# Altium PCB USB_Sniffer.PcbDoc (part 1 of 2)
Units mm, origin at the board's own origin, x right, y up, seen from the top; angles counter-clockwise.
Board outline 50 x 42 mm, 4 copper layers (Top Layer, Int1 (GND), Int2 (GND), Bottom Layer), stack 1.564 mm thick; 83 components, 92 nets, 421 pads, 171 vias.
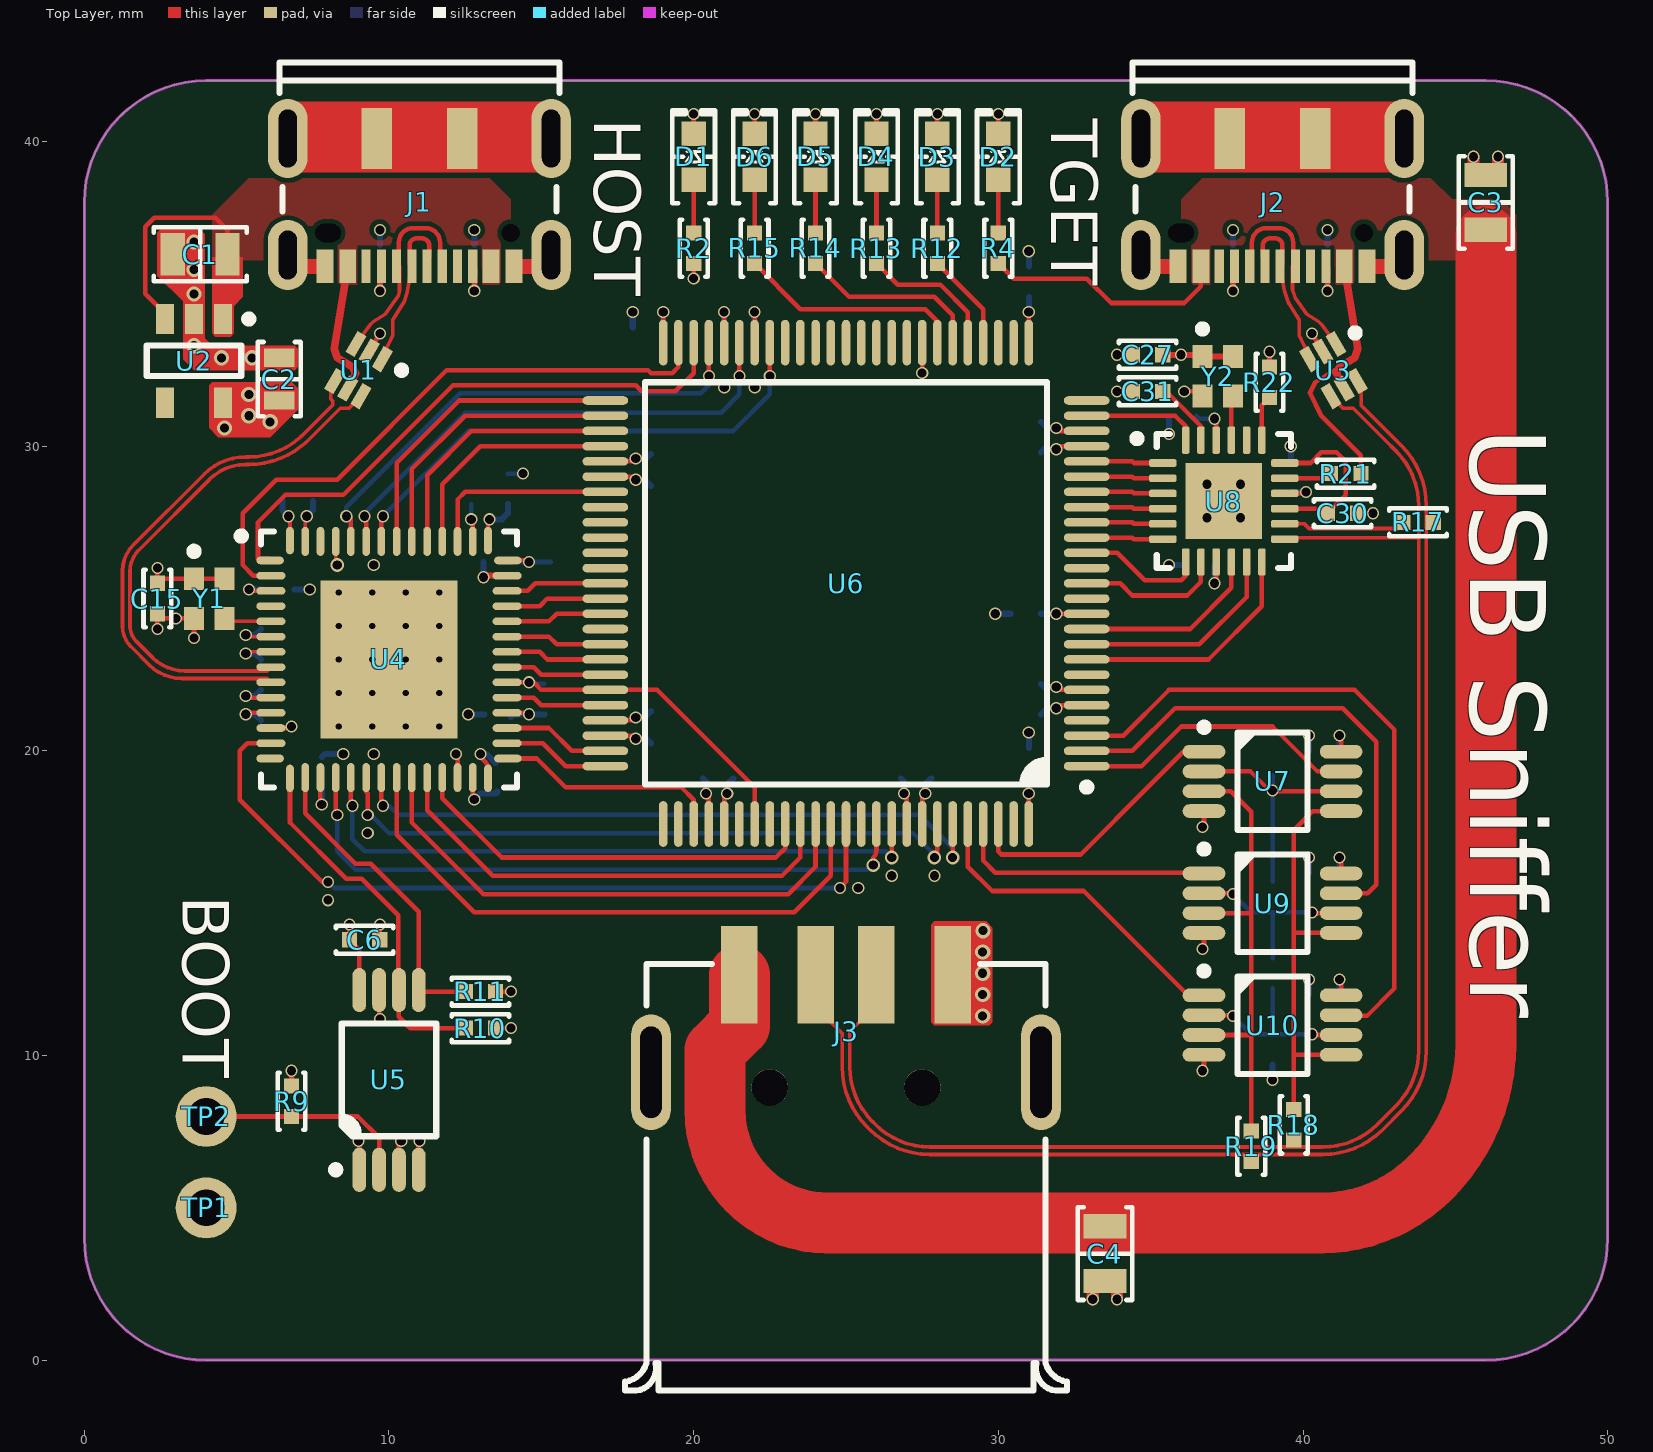
[diagram p0: Top Layer view]
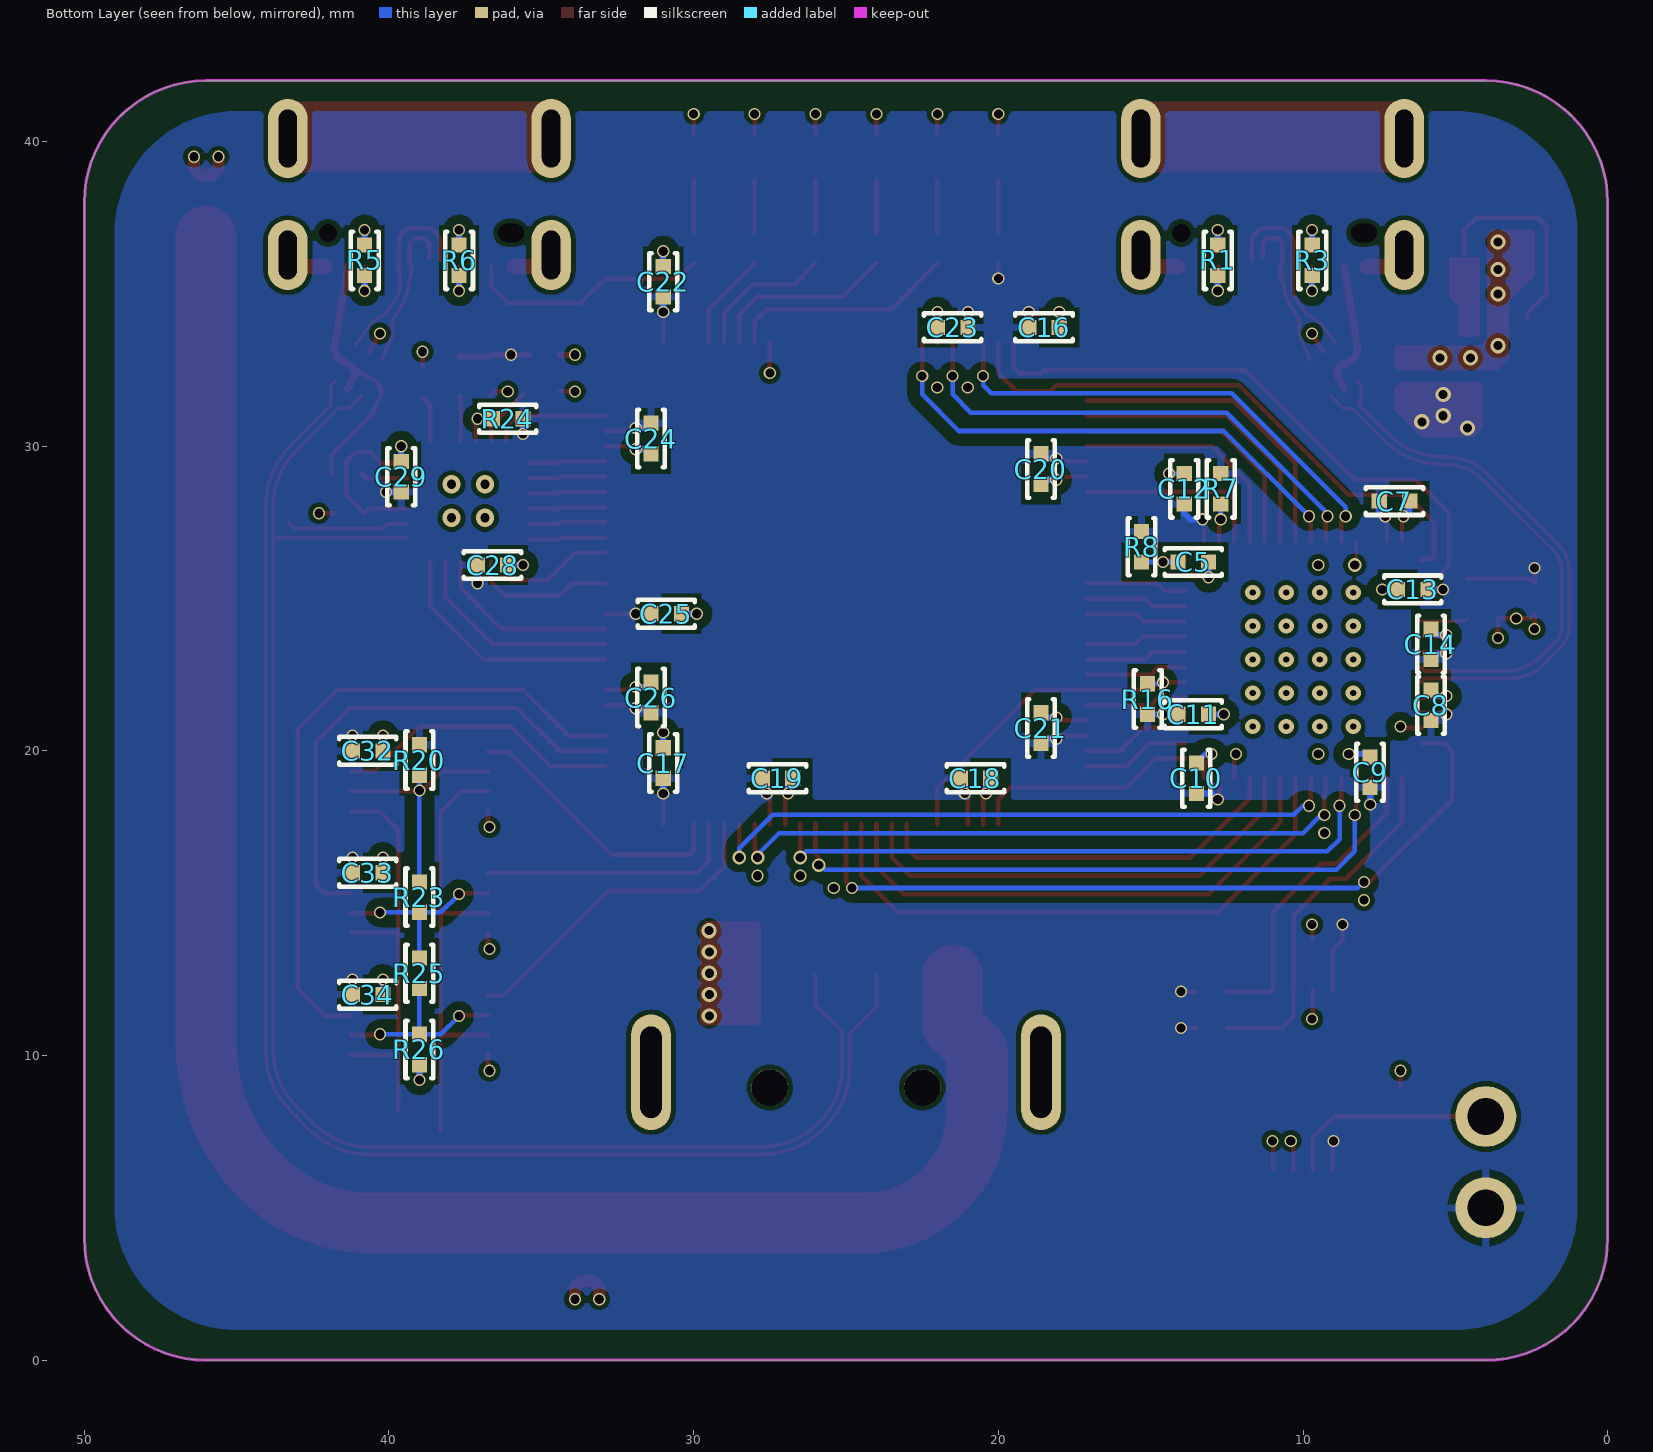
[diagram p1: Bottom Layer view, seen from below]
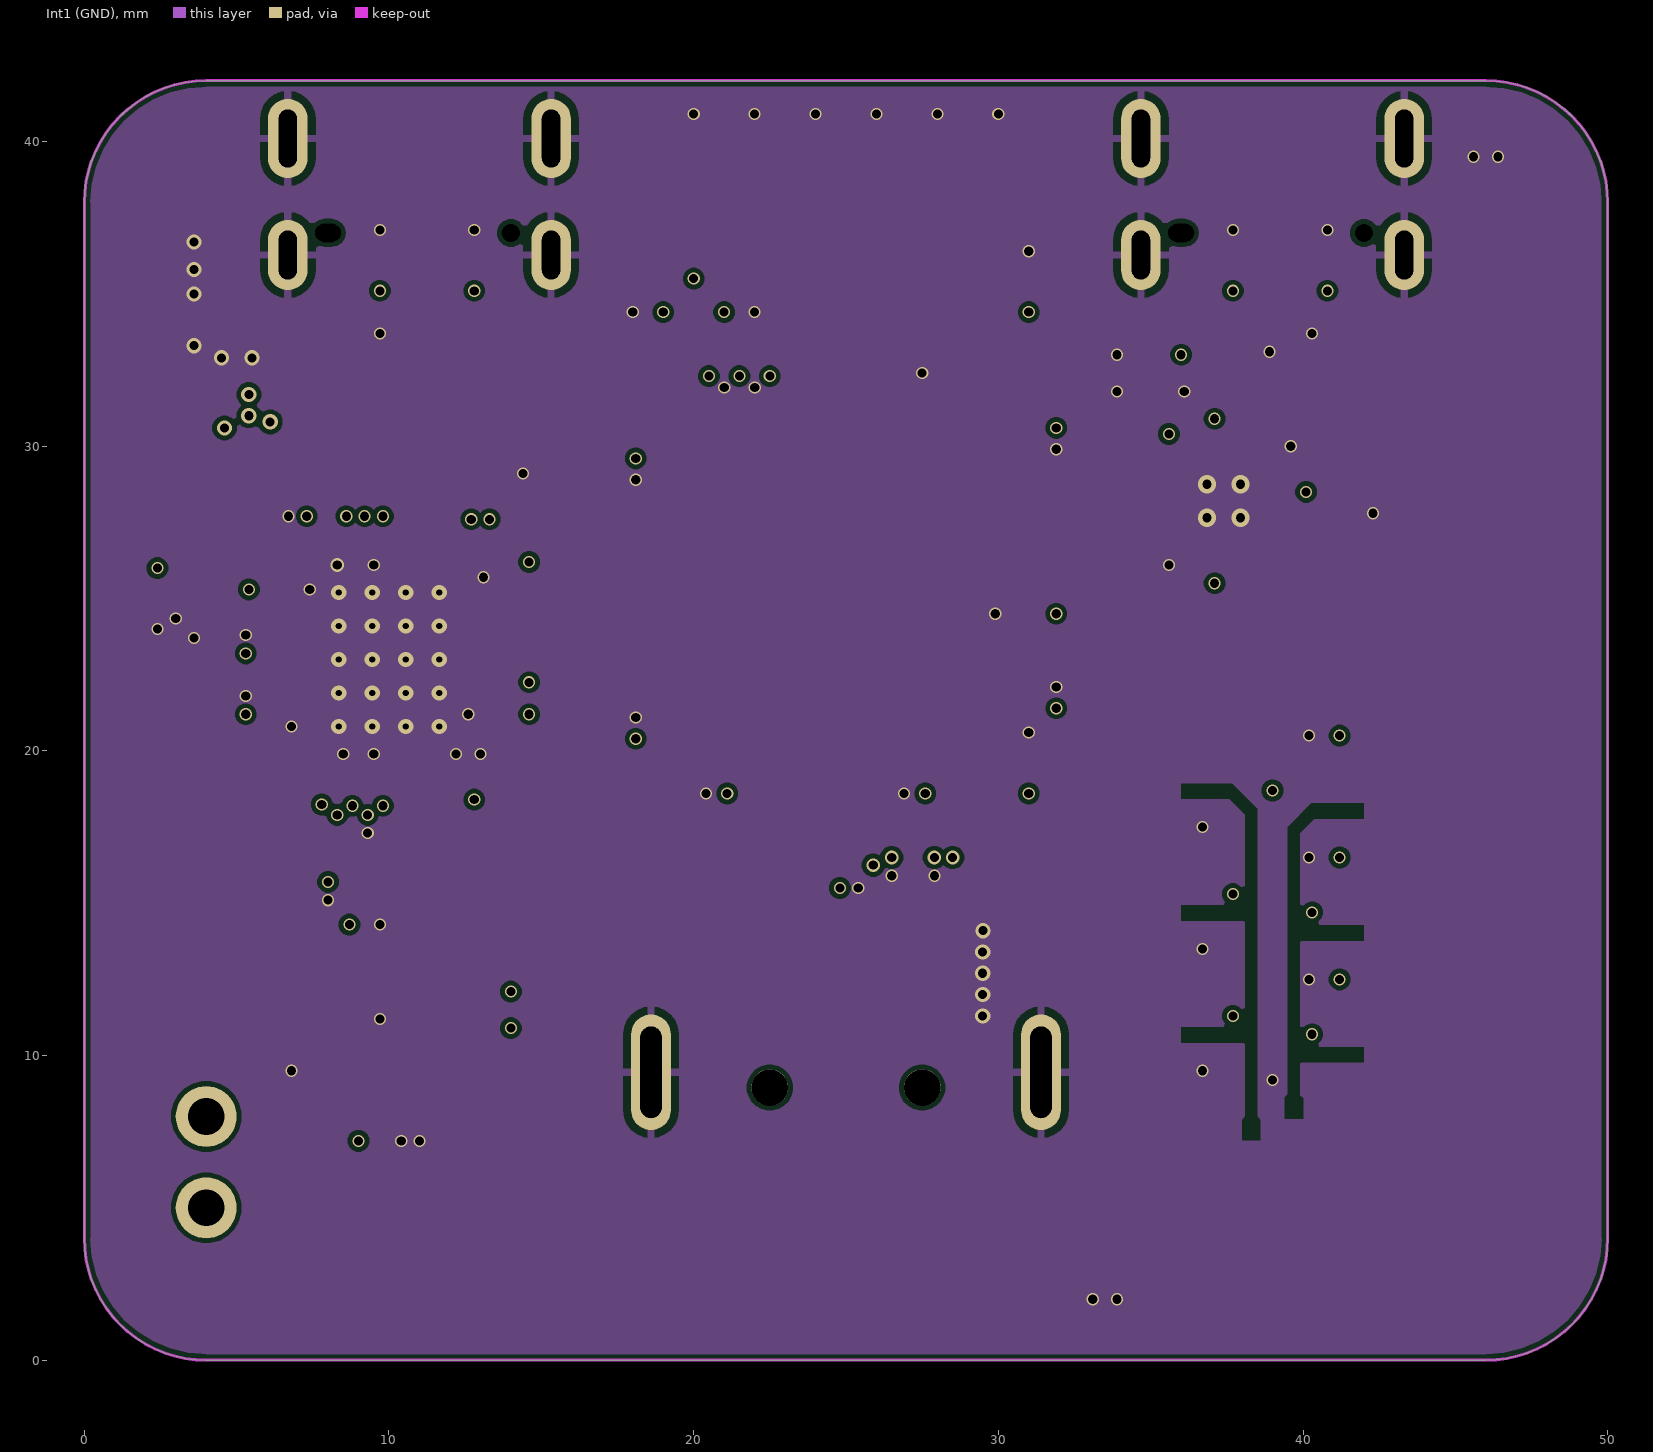
[diagram p2: Int1 (GND)]
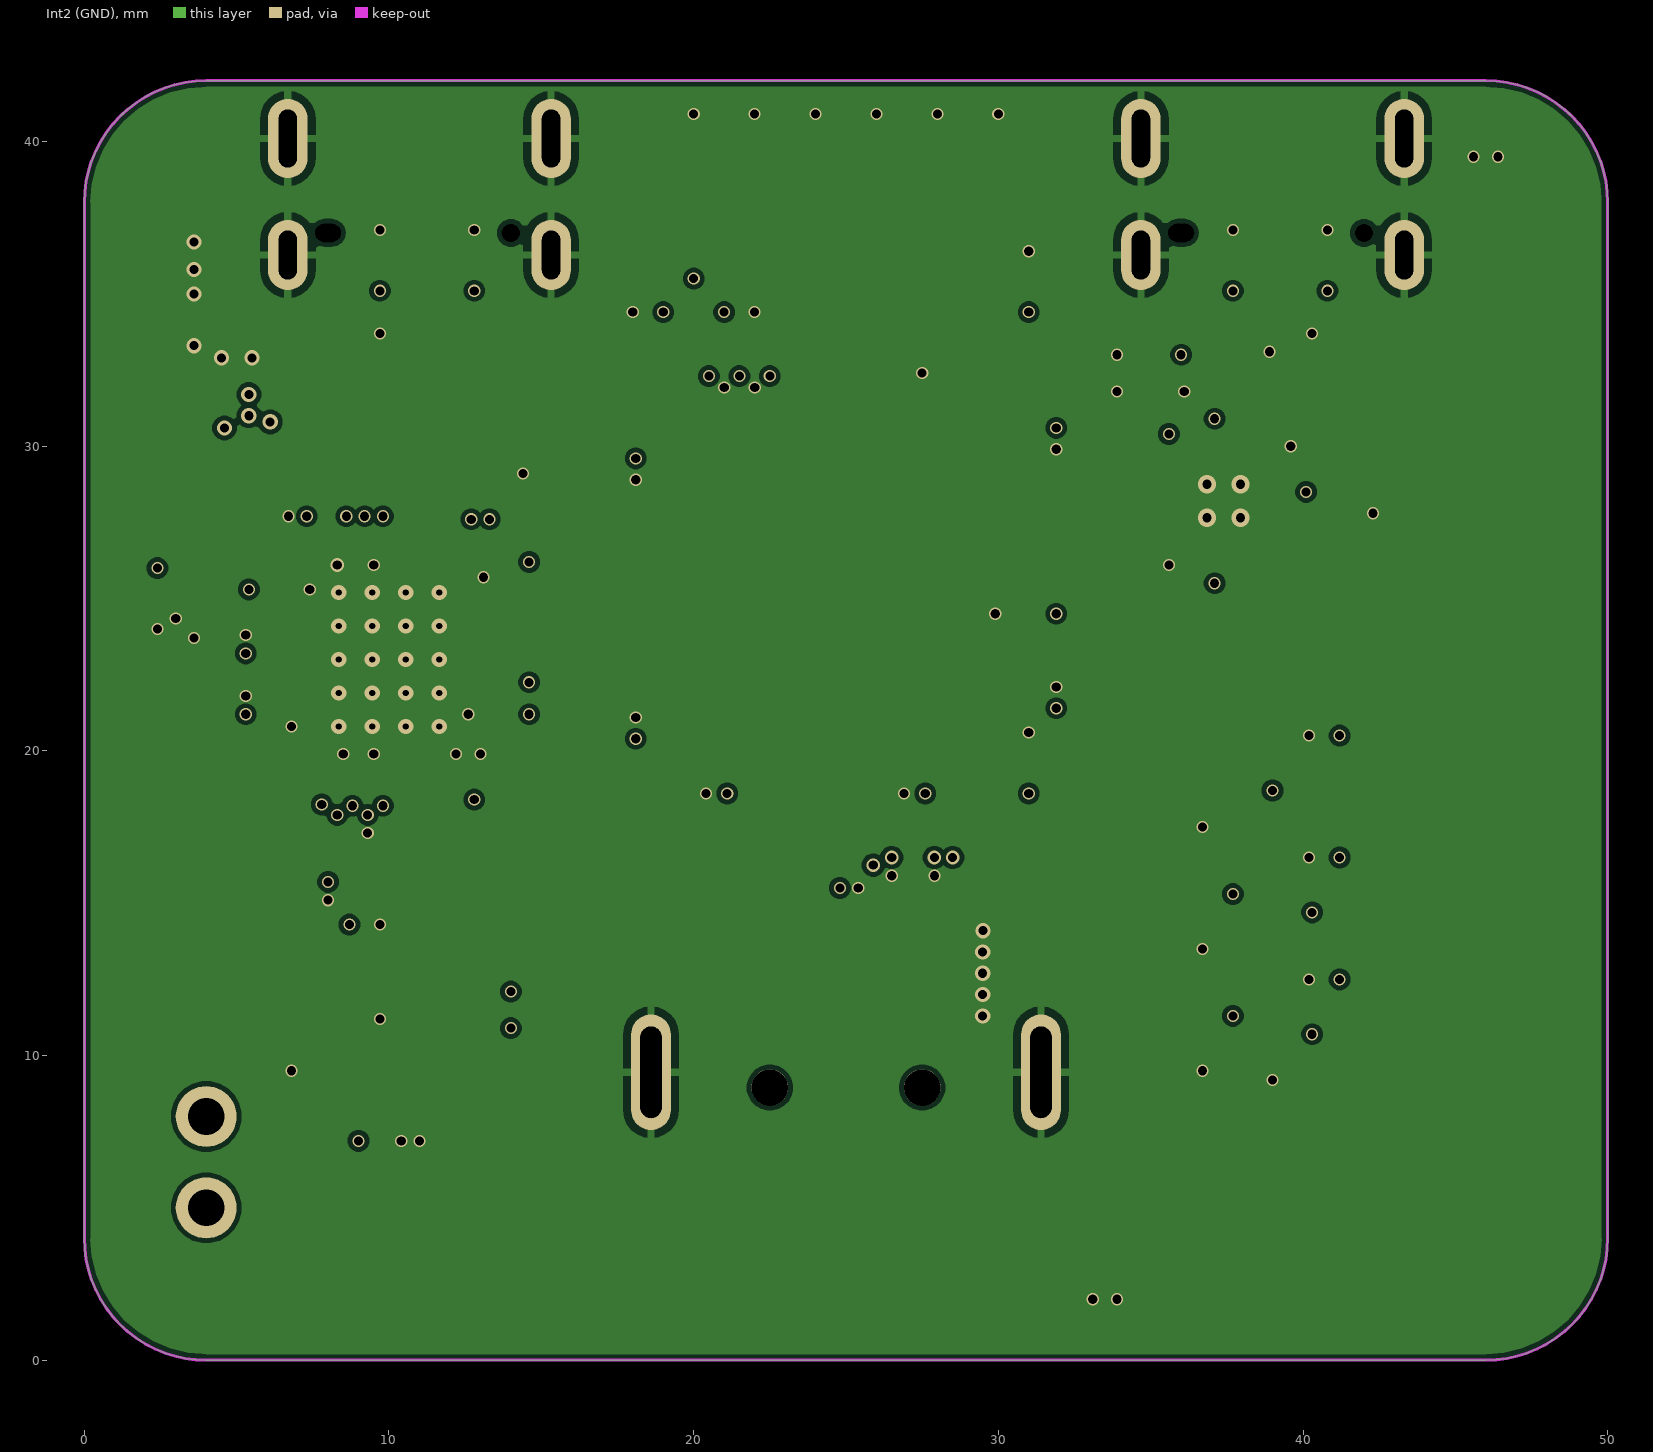
[diagram p3: Int2 (GND)]

## Layer stack, top to bottom
Top Solder: solder mask 0.0254, SM-001, Dk 4
Top Layer: signal copper 0.035
Dielectric 1: prepreg 0.0994, PP-017, Dk 4.3
Int1 (GND): signal copper 0.0152
Dielectric 3: core 1.265, Core-039, Dk 4.8
Int2 (GND): signal copper 0.0152
Dielectric 5: prepreg 0.0994, PP-017, Dk 4.3
Bottom Layer: signal copper 0.035
Bottom Solder: solder mask 0.0254, SM-001, Dk 4

## Board outline
4,0 46,0 ccw(c46,4) 50,4 50,38 ccw(c46,38) 46,42 4,42 ccw(c4,38) 0,38 0,4 ccw(c4,4)

## Design rules (kind name [scope] priority, off if disabled: settings)
Clearance Clearance_Poly_3.3V [InNet('3.3V') vs OnLayer('Bottom Layer')] p1: gap=0.15 ignorepadtopadclearanceinfootprint=TRUE except(0.1: Arc-Arc Arc-Track Track-Track; 0.4: Arc-Fill Arc-Poly Arc-Region Track-Fill Track-Poly Track-Region SMDPad-Fill SMDPad-Poly SMDPad-Region THPad-Fill THPad-Poly THPad-Region Via-Fill Via-Poly Via-Region Fill-Fill Fill-Poly Fill-Region Poly-Poly Poly-Region Region-Region)
Clearance [All] p2: gap=0.15 ignorepadtopadclearanceinfootprint=TRUE except(0.1: Arc-Arc Arc-Track Track-Track)
DiffPairsRouting [All] p1: maxlimit=0.254 minlimit=0.1 mostfreqgap=0.127 toplayer_mingap=0.127 toplayer_maxgap=0.127 toplayer_minwidth=0.12 toplayer_maxwidth=0.12 toplayer_prefwidth=0.12 bottomlayer_mingap=0.127 bottomlayer_maxgap=0.127 bottomlayer_minwidth=0.12 bottomlayer_maxwidth=0.12 bottomlayer_prefwidth=0.12 impedanceprofiledriven=TRUE impedanceprofileid={BF7C3D24-CFCF-4BB6-959E-C97C2D76575A} impedanceprofilevalue=90.000000 maxuncoupledlength=12.7
HoleSize [All] p1: absolutevalues=TRUE maxlimit=3 minlimit=0.025 maxpercent=80.000 minpercent=20.000
MinimumSolderMaskSliver [All] p1: minsoldermaskwidth=0.1
PolygonConnect PolygonConnect_VIA [All vs IsVia] p1: connectstyle=Direct reliefconductorwidth=0.254 reliefentries=4 polygonreliefangle="90 Angle" airgapwidth=0.254
PolygonConnect [All] p2: connectstyle=Relief reliefconductorwidth=0.254 reliefentries=4 polygonreliefangle="90 Angle" airgapwidth=0.254
RoutingVias [All] p1: holewidth=0.3 width=0.4 viastyle="Through Hole" minholewidth=0.2 minwidth=0.4 maxholewidth=1 maxwidth=2
SilkToSilkClearance [All] p1 off: silktosilkclearance=0.254
SilkToSolderMaskClearance [IsPad] p1: minsilkscreentomaskgap=0.05 clearancetoexposedcopper=TRUE
SolderMaskExpansion [All] p1: expansion=0.04 istentingtop=FALSE
Width [All] p1: maxlimit=5 minlimit=0.1 preferedwidth=0.15
25 further rules are at their usual default settings.

## Classes and differential pairs
net class FD[0..15]: FD0 FD1 FD2 FD3 FD4 FD5 FD6 FD7 FD8 FD9 FD10 FD11 FD12 FD13 FD14 FD15
component class U_Target: C27 C28 C29 C30 C31 C32 C33 C34 R17 R18 R19 R20 R21 R22 R23 R24 R25 R26 U7 U8 U9 U10 Y2
component class U_Port: C1 C2 C3 C4 D1 D2 J1 J2 J3 R1 R2 R3 R4 R5 R6 U1 U2 U3
component class U_Host: C5 C6 C7 C8 C9 C10 C11 C12 C13 C14 C15 R7 R8 R9 R10 R11 TP1 TP2 U4 U5 Y1
component class U_CPLD: C16 C17 C18 C19 C20 C21 C22 C23 C24 C25 C26 D3 D4 D5 D6 R12 R13 R14 R15 R16 U6
differential pair USBT: +USBT_P -USBT_N
differential pair USBH: +USBH_P -USBH_N

## Components (designator, comment, footprint, x,y, rotation, side; value= is the part's Value field where it differs from the comment)
C1 "22uF" "CAP 0805/2012" 3.8,36.3 r0 top
C2 "10uF" "CAP 0603/1608" 6.4,32.2 r270 top
C3 "22uF" "CAP 0805/2012" 46,38 r270 top
C4 "22uF" "CAP 0805/2012" 33.5,3.5 r90 top
C5 "4.7uF" "CAP 0402/1005" 13.6,26.2 r180 bottom
C6 "100nF" "CAP 0402/1005" 9.2,13.8 r0 top
C7 "100nF" "CAP 0402/1005" 7,28.2 r180 bottom
C8 "100nF" "CAP 0402/1005" 5.8,21.5 r270 bottom
C9 "100nF" "CAP 0402/1005" 7.8,19.3 r270 bottom
C10 "100nF" "CAP 0402/1005" 13.5,19.1 r270 bottom
C11 "100nF" "CAP 0402/1005" 13.6,21.2 r0 bottom
C12 "100nF" "CAP 0402/1005" 13.9,28.6 r270 bottom
C13 "100nF" "CAP 0402/1005" 6.4,25.3 r180 bottom
C14 "100nF" "CAP 0402/1005" 5.8,23.5 r270 bottom
C15 "100nF" "CAP 0402/1005" 2.4,25 r270 top
C16 "100nF" "CAP 0402/1005" 18.5,33.9 r180 bottom
C17 "100nF" "CAP 0402/1005" 31,19.6 r270 bottom
C18 "100nF" "CAP 0402/1005" 20.75,19.1 r180 bottom
C19 "100nF" "CAP 0402/1005" 27.25,19.1 r180 bottom
C20 "100nF" "CAP 0402/1005" 18.6,29.25 r270 bottom
C21 "100nF" "CAP 0402/1005" 18.6,20.75 r90 bottom
C22 "100nF" "CAP 0402/1005" 31,35.4 r90 bottom
C23 "100nF" "CAP 0402/1005" 21.5,33.9 r0 bottom
C24 "100nF" "CAP 0402/1005" 31.4,30.25 r270 bottom
C25 "100nF" "CAP 0402/1005" 30.9,24.5 r180 bottom
C26 "100nF" "CAP 0402/1005" 31.4,21.75 r90 bottom
C27 "100nF" "CAP 0402/1005" 34.9,33 r180 top
C28 "100nF" "CAP 0402/1005" 36.6,26.1 r180 bottom
C29 "100nF" "CAP 0402/1005" 39.6,29 r270 bottom
C30 "1uF" "CAP 0402/1005" 41.3,27.8 r180 top
C31 "1uF" "CAP 0402/1005" 34.9,31.8 r0 top
C32 "100nF" "CAP 0402/1005" 40.7,20 r180 bottom
C33 "100nF" "CAP 0402/1005" 40.7,16 r180 bottom
C34 "100nF" "CAP 0402/1005" 40.7,12 r180 bottom
D1 "Green" "LED 0603/1608 GREEN" 20,39.5 r90 top
D2 "Red" "LED 0603/1608 RED" 30,39.5 r90 top value=Green
D3 "Yellow" "LED 0603/1608 YELLOW" 28,39.5 r90 top value=Green
D4 "Yellow" "LED 0603/1608 YELLOW" 26,39.5 r90 top value=Green
D5 "Yellow" "LED 0603/1608 YELLOW" 24,39.5 r90 top value=Green
D6 "Yellow" "LED 0603/1608 YELLOW" 22,39.5 r90 top value=Green
J1 "USB C 12P" "JAE USB DX07S016JA1R1500"#1 11,39 r180 top locked
J2 "USB C 12P" "JAE USB DX07S016JA1R1500"#2 39,39 r180 top
J3 "USB 2.0 Type A Receptacle" 629104151021 25,6 r0 top
R1 "5.1K" "RES 0402/1005" 12.8,36.1 r270 bottom
R2 "2.2K" "RES 0402/1005" 20,36.5 r270 top
R3 "5.1K" "RES 0402/1005" 9.7,36.1 r270 bottom
R4 "2.2K" "RES 0402/1005" 30,36.5 r90 top
R5 "5.1K" "RES 0402/1005" 40.8,36.1 r270 bottom
R6 "5.1K" "RES 0402/1005" 37.7,36.1 r270 bottom
R7 "10K" "RES 0402/1005" 12.7,28.6 r90 bottom
R8 "10K" "RES 0402/1005" 15.3,26.7 r90 bottom
R9 "10K" "RES 0402/1005" 6.8,8.5 r270 top
R10 "2.2K" "RES 0402/1005" 13,10.9 r0 top
R11 "2.2K" "RES 0402/1005" 13,12.1 r0 top
R12 "2.2K" "RES 0402/1005" 28,36.5 r270 top
R13 "2.2K" "RES 0402/1005" 26,36.5 r270 top
R14 "2.2K" "RES 0402/1005" 24,36.5 r270 top
R15 "2.2K" "RES 0402/1005" 22,36.5 r270 top
R16 "10K" "RES 0402/1005" 15.1,21.7 r270 bottom
R17 "0" "RES 0402/1005" 43.775,27.5 r0 top
R18 "470" "RES 0402/1005" 39.7,7.725 r270 top
R19 "470" "RES 0402/1005" 38.3,7.025 r270 top
R20 "10K" "RES 0402/1005" 39,19.7 r90 bottom
R21 "20K" "RES 0402/1005" 41.4,29.1 r180 top
R22 "8.06K" "RES 0402/1005" 38.9,32.1 r270 top
R23 "33K" "RES 0402/1005" 39,15.2 r90 bottom
R24 "10K" "RES 0402/1005" 36.1,30.9 r0 bottom
R25 "4.7K" "RES 0402/1005" 39,12.7 r90 bottom
R26 "4.7K" "RES 0402/1005" 39,10.2 r90 bottom
TP1 "Test Point" "TP 1MM" 4,5 r90 top
TP2 "Test Point" "TP 1MM" 4,8 r90 top
U1 "USBLC6-2P6" SOTFL50P160X60-6N 9,32.5 r240 top
U2 "TPS7A2033PDBVR" SOT95P280X110-5N 3.6,32.8 r270 top
U3 "USBLC6-2P6" SOTFL50P160X60-6N 41,32.5 r300 top
U4 "CY7C68013A-56LTXC" QFN50P800X800X90_HS-57N 10,23 r0 top
U5 "8K (4 x 256 x 8)" "MICROCHIP TSSOP-8 ST" 10,9.2 r90 top
U6 "LCMXO2-2000HC-5TG100C" "NXP LQFP-100 14x14mm" 25,25.5 r180 top
U7 "MAX9032AUA+" TSOP65P490X110-8N 39,19 r0 top
U8 "USB3343-CP" QFN50P400X400X80_HS-25N 37.4,28.2 r0 top
U9 "MAX9032AUA+" TSOP65P490X110-8N 39,15 r0 top
U10 "MAX9032AUA+" TSOP65P490X110-8N 39,11 r0 top
Y1 "24MHz" WE-SPXO_IQXO-540 4.1,25 r270 top
Y2 "26MHz" WE-SPXO_IQXO-540 37.2,32.3 r270 top

## Footprints (in the part's own frame and the unit in brackets; to place one, negate y for a bottom-side part, rotate by r counter-clockwise, add the part's x,y. Pads: shape width x height; smd on the part's side, far side on the other; paste and mask are expansions set on the pad)
629104151021 [mm] "USB 2.0 Type A Horizontal SMT with pegs"
  rect 1.2x3.2 smd: 1(-3.5,6.65) 2(-1,6.65) 3(1,6.65) 4(3.5,6.65)
  round 1.2 hole 1.2 unplated: MH1(-2.5,2.95) MH2(2.5,2.95)
  oval 1.3x3.8 hole 0.7 slot 3 at 90 deg: S(-6.4,3.45) S(6.4,3.45)
  silkscreen extent -7.25,-7 7.25,7, body extent -7.25,-7 7.25,8.2, height 7.34
"CAP 0402/1005" [mm] "Chip Capacitor, 2-Leads, Body 1.02x0.51mm, IPC Medium Density"
  rect 0.5x0.5 smd: 1(-0.5,0) 2(0.5,0)
  silkscreen extent -0.94,-0.46 0.94,0.46, body extent -0.5,-0.26 0.5,0.26, height 0.52
"CAP 0603/1608" [mm] "Chip Capacitor, 2-Leads, Body 1.60x0.80mm, IPC Medium Density"
  rect 0.6x1 smd: 1(-0.7,0) 2(0.7,0)
  silkscreen extent -1.22,-0.71 1.22,0.7, body extent -0.8,-0.41 0.8,0.41, height 0.82
"CAP 0805/2012" [mm] "Chip Capacitor, 2-Leads, Body 2.00x1.20mm, IPC Medium Density"
  rect 0.8x1.4 smd: 1(-0.9,0) 2(0.9,0)
  silkscreen extent -1.52,-0.89 1.52,0.89, body extent -1,-0.63 1,0.64, height 1.26
"JAE USB DX07S016JA1R1500"#1 [mm]
  rect 0.55x1.1 smd mask+0.02: 1(-3.1,3.1) 2(-2.35,3.1) 11(2.35,3.1) 12(3.1,3.1)
  rect 0.3x1.1 smd mask+0.02: 3(-1.75,3.1) 4(-1.25,3.1) 5(-0.75,3.1) 6(-0.25,3.1) 7(0.25,3.1) 8(0.75,3.1) 9(1.25,3.1) 10(1.75,3.1)
  round 0 hole 0.6 unplated: M(-3,2)
  round 0 hole 0.6 slot 0.85 at 0 deg unplated: M(3,2)
  oval 1.3x2.6 hole 0.6 slot 1.9 at 90 deg paste+0.05: S(-4.32,-1.1) S(4.32,-1.1)
  oval 1.3x2.3 hole 0.6 slot 1.6 at 90 deg paste+0.05: S(-4.32,2.725) S(4.32,2.725)
  rect 1x2 smd paste+0.05: S(-1.4,-1.1) S(1.4,-1.1)
  silkscreen extent -4.6,-3.6 4.6,1.3, body extent -4.47,-3.55 4.47,3.35, height 3.18
"JAE USB DX07S016JA1R1500"#2 [mm]
  rect 0.55x1.1 smd mask+0.02: 1(-3.1,3.1) 2(-2.35,3.1) 12(3.1,3.1)
  rect 0.3x1.1 smd mask+0.02: 3(-1.75,3.1) 4(-1.25,3.1) 5(-0.75,3.1) 6(-0.25,3.1) 7(0.25,3.1) 8(0.75,3.1) 9(1.25,3.1) 10(1.75,3.1)
  rect 0.55x1.1 smd: 11(2.35,3.1)
  round 0 hole 0.6 unplated: M(-3,2)
  round 0 hole 0.6 slot 0.85 at 0 deg unplated: M(3,2)
  oval 1.3x2.6 hole 0.6 slot 1.9 at 90 deg paste+0.05: S(-4.32,-1.1) S(4.32,-1.1)
  oval 1.3x2.3 hole 0.6 slot 1.6 at 90 deg paste+0.05: S(-4.32,2.725) S(4.32,2.725)
  rect 1x2 smd paste+0.05: S(-1.4,-1.1) S(1.4,-1.1)
  silkscreen extent -4.6,-3.6 4.6,1.3, body extent -4.47,-3.55 4.47,3.35, height 3.18
"LED 0603/1608 GREEN" [mm] "Chip Diode, 2-Leads, Body 1.60x0.80mm, IPC Medium Density"
  rect 0.8x0.8 smd: 1(-0.75,0) 2(0.75,0)
  silkscreen extent -1.52,-0.7 1.52,0.7, body extent -0.8,-0.4 0.8,0.4, height 0.53
"LED 0603/1608 RED" [mm] "Chip Diode, 2-Leads, Body 1.60x0.80mm, IPC Medium Density"
  rect 0.8x0.8 smd: 1(-0.75,0) 2(0.75,0)
  silkscreen extent -1.52,-0.7 1.52,0.7, body extent -0.8,-0.4 0.8,0.4, height 0.53
"LED 0603/1608 YELLOW" [mm] "Chip Diode, 2-Leads, Body 1.60x0.80mm, IPC Medium Density"
  rect 0.8x0.8 smd: 1(-0.75,0) 2(0.75,0)
  silkscreen extent -1.52,-0.7 1.52,0.7, body extent -0.8,-0.4 0.8,0.4, height 0.53
"MICROCHIP TSSOP-8 ST" [mm] "TSSOP, 8-Leads, Body 3.00x4.40mm, Pitch 0.65mm, IPC Medium Density"
  oval 1.45x0.45 smd: 1(-2.95,0.975) 2(-2.95,0.325) 3(-2.95,-0.325) 4(-2.95,-0.975) 5(2.95,-0.975) 6(2.95,-0.325) 7(2.95,0.325) 8(2.95,0.975)
  silkscreen extent -3.07,-1.55 1.85,1.87, body extent -3.21,-1.5 3.21,1.5, height 1.2
"NXP LQFP-100 14x14mm" [mm] "TQFP, 100-Leads, Body 14.00x14.00mm, Pitch 0.50mm, IPC Medium Density"
  oval 1.5x0.28 smd: 1(-7.9,6) 2(-7.9,5.5) 3(-7.9,5) 4(-7.9,4.5) 5(-7.9,4) 6(-7.9,3.5) 7(-7.9,3) 8(-7.9,2.5) 9(-7.9,2) 10(-7.9,1.5) 11(-7.9,1) 12(-7.9,0.5) 13(-7.9,0) 14(-7.9,-0.5) 15(-7.9,-1) 16(-7.9,-1.5) 17(-7.9,-2) 18(-7.9,-2.5) 19(-7.9,-3) 20(-7.9,-3.5) 21(-7.9,-4) 22(-7.9,-4.5) 23(-7.9,-5) 24(-7.9,-5.5) 25(-7.9,-6) 51(7.9,-6) 52(7.9,-5.5) 53(7.9,-5) 54(7.9,-4.5) 55(7.9,-4) 56(7.9,-3.5) 57(7.9,-3) 58(7.9,-2.5) 59(7.9,-2) 60(7.9,-1.5) 61(7.9,-1) 62(7.9,-0.5) 63(7.9,0) 64(7.9,0.5) 65(7.9,1) 66(7.9,1.5) 67(7.9,2) 68(7.9,2.5) 69(7.9,3) 70(7.9,3.5) 71(7.9,4) 72(7.9,4.5) 73(7.9,5) 74(7.9,5.5) 75(7.9,6)
  oval 0.28x1.5 smd: 26(-6,-7.9) 27(-5.5,-7.9) 28(-5,-7.9) 29(-4.5,-7.9) 30(-4,-7.9) 31(-3.5,-7.9) 32(-3,-7.9) 33(-2.5,-7.9) 34(-2,-7.9) 35(-1.5,-7.9) 36(-1,-7.9) 37(-0.5,-7.9) 38(0,-7.9) 39(0.5,-7.9) 40(1,-7.9) 41(1.5,-7.9) 42(2,-7.9) 43(2.5,-7.9) 44(3,-7.9) 45(3.5,-7.9) 46(4,-7.9) 47(4.5,-7.9) 48(5,-7.9) 49(5.5,-7.9) 50(6,-7.9) 76(6,7.9) 77(5.5,7.9) 78(5,7.9) 79(4.5,7.9) 80(4,7.9) 81(3.5,7.9) 82(3,7.9) 83(2.5,7.9) 84(2,7.9) 85(1.5,7.9) 86(1,7.9) 87(0.5,7.9) 88(0,7.9) 89(-0.5,7.9) 90(-1,7.9) 91(-1.5,7.9) 92(-2,7.9) 93(-2.5,7.9) 94(-3,7.9) 95(-3.5,7.9) 96(-4,7.9) 97(-4.5,7.9) 98(-5,7.9) 99(-5.5,7.9) 100(-6,7.9)
  silkscreen extent -8.03,-6.6 6.6,6.81, body extent -8.01,-8.01 8.01,8.01, height 1.55
QFN50P400X400X80_HS-25N [mm] "QFN, 24-Leads, Body 4.00x4.00mm, Pitch 0.50mm, Thermal Pad 2.50x2.50mm, IPC Medium Density"
  rrect50% 0.9x0.25 smd: 1(-2,1.25) 2(-2,0.75) 3(-2,0.25) 4(-2,-0.25) 5(-2,-0.75) 6(-2,-1.25) 13(2,-1.25) 14(2,-0.75) 15(2,-0.25) 16(2,0.25) 17(2,0.75) 18(2,1.25)
  rrect50% 0.25x0.9 smd: 7(-1.25,-2) 8(-0.75,-2) 9(-0.25,-2) 10(0.25,-2) 11(0.75,-2) 12(1.25,-2) 19(1.25,2) 20(0.75,2) 21(0.25,2) 22(-0.25,2) 23(-0.75,2) 24(-1.25,2)
  rect 2.5x2.5 smd paste-3: 25(0,0)
  silkscreen extent -2.97,-2.2 2.2,2.2, body extent -2.06,-2.06 2.06,2.06, height 0.8
QFN50P800X800X90_HS-57N [mm] "QFN, 56-Leads, Body 8.00x8.00mm, Pitch 0.50mm, Thermal Pad 4.50x5.20mm, IPC Medium Density"
  oval 0.9x0.25 smd mask+0.05: 1(-3.9,3.25) 14(-3.9,-3.25) 29(3.9,-3.25) 42(3.9,3.25)
  oval 0.95x0.25 smd mask+0.05: 2(-3.875,2.75) 3(-3.875,2.25) 4(-3.875,1.75) 5(-3.875,1.25) 6(-3.875,0.75) 7(-3.875,0.25) 8(-3.875,-0.25) 9(-3.875,-0.75) 10(-3.875,-1.25) 11(-3.875,-1.75) 12(-3.875,-2.25) 13(-3.875,-2.75) 30(3.875,-2.75) 31(3.875,-2.25) 32(3.875,-1.75) 33(3.875,-1.25) 34(3.875,-0.75) 35(3.875,-0.25) 36(3.875,0.25) 37(3.875,0.75) 38(3.875,1.25) 39(3.875,1.75) 40(3.875,2.25) 41(3.875,2.75)
  oval 0.25x0.9 smd mask+0.05: 15(-3.25,-3.9) 28(3.25,-3.9) 43(3.25,3.9) 56(-3.25,3.9)
  oval 0.25x0.95 smd mask+0.05: 16(-2.75,-3.875) 17(-2.25,-3.875) 18(-1.75,-3.875) 19(-1.25,-3.875) 20(-0.75,-3.875) 21(-0.25,-3.875) 22(0.25,-3.875) 23(0.75,-3.875) 24(1.25,-3.875) 25(1.75,-3.875) 26(2.25,-3.875) 27(2.75,-3.875) 44(2.75,3.875) 45(2.25,3.875) 46(1.75,3.875) 47(1.25,3.875) 48(0.75,3.875) 49(0.25,3.875) 50(-0.25,3.875) 51(-0.75,3.875) 52(-1.25,3.875) 53(-1.75,3.875) 54(-2.25,3.875) 55(-2.75,3.875)
  rect 4.5x5.2 smd: 57(0,0)
  silkscreen extent -4.97,-4.2 4.2,4.2, body extent -4.06,-4.06 4.06,4.06, height 0.9
"RES 0402/1005" [mm] "Chip Resistor, 2-Leads, Body 1.0x0.5mm, IPC Medium Density"
  rect 0.5x0.5 smd: 1(-0.5,0) 2(0.5,0)
  silkscreen extent -0.94,-0.46 0.94,0.46, body extent -0.5,-0.25 0.5,0.25, height 0.35
SOT95P280X110-5N [mm] "SOT23, 5-Leads, Body 2.90x2.80mm, Pitch 0.95mm, IPC Medium Density"
  rect 1x0.6 smd: 1(-1.375,0.95) 2(-1.375,0) 3(-1.375,-0.95) 4(1.375,-0.95) 5(1.375,0.95)
  silkscreen extent -1.5,-1.55 0.5,1.93, body extent -1.53,-1.53 1.53,1.53, height 1.1
SOTFL50P160X60-6N [mm] "SOTFL, 6-Leads, Body 1.60x1.60mm, Pitch 0.50mm, IPC Medium Density"
  rect 0.8x0.35 smd mask+0.02: 1(-0.7,0.5) 2(-0.7,0) 3(-0.7,-0.5) 4(0.7,-0.5) 5(0.7,0) 6(0.7,0.5)
  silkscreen extent -0.82,1.1 -0.58,1.35, body extent -0.8,-0.85 0.8,0.85, height 0.6
"TP 1MM" [mm] "Testpoint 1mm"
  round 2 hole 1.2 mask+0.02: 1(0,0)
TSOP65P490X110-8N [mm] "TSOP, 8-Leads, Body 3.00x2.95mm, Pitch 0.65mm, IPC Medium Density"
  oval 1.4x0.45 smd: 1(-2.25,0.975) 2(-2.25,0.325) 3(-2.25,-0.325) 4(-2.25,-0.975) 5(2.25,-0.975) 6(2.25,-0.325) 7(2.25,0.325) 8(2.25,0.975)
  silkscreen extent -2.37,-1.6 1.15,1.9, body extent -2.45,-1.6 2.45,1.6, height 1.1
WE-SPXO_IQXO-540 [mm] "Simple Packaged Quartz Oscillator, body 2x1.6mm"
  rect 0.75x0.65 smd: 1(-0.65,-0.5) 2(0.65,-0.5) 3(0.65,0.5) 4(-0.65,0.5)
  silkscreen extent -1.67,-0.62 -1.43,-0.37, body extent -1,-0.8 1,0.8, height 0.7

## Part data
C1 C3 C4: library part CM1163, "CAP CER 22UF 10V X5R 0805", Device Package="0805 (2012 Metric)", Manufacturer=Murata, Part Number=GRM219R61A226MEA0D, Supplier Part Number 1=490-9951-2-ND, TemperatureCoefficient=X5R, TemperatureRange="-55C ~ 85C", Tolerance=20%, Voltage=10V, ComponentLink1Description=Datasheet, ComponentLink1URL=http://www.murata.com/~/media/webrenewal/support/library/catalog/products/capacitor/mlcc/c02e.pdf, ComponentLink2Description="Digi-Key Listing", ComponentLink2URL=https://www.digikey.com/product-detail/en/murata-electronics-north-america/GRM219R61A226MEA0D/490-9951-2-ND/4905417, PartId=CM1163, Price=0.0844, Supplier 1=Digi-Key
C2: library part CM0905, "CAP CER 10UF 25V X5R 0603", Device Package="0603 (1608 Metric)", Manufacturer=Murata, Part Number=GRM188R61E106MA73D, Supplier Part Number 1=490-7202-2-ND, TemperatureCoefficient=X5R, TemperatureRange="-55C ~ 85C", Tolerance=20%, Voltage=25V, ComponentLink1Description=Datasheet, ComponentLink1URL=http://www.murata.com/~/media/webrenewal/support/library/catalog/products/capacitor/mlcc/c02e.pdf, ComponentLink2Description="Digi-Key Listing", ComponentLink2URL=https://www.digikey.com/product-detail/en/murata-electronics-north-america/GRM188R61E106MA73D/490-7202-2-ND/3900497, PartId=CM0905, Price=0.0858, Supplier 1=Digi-Key
C5: library part CM0507, "CAP CER 4.7UF 6.3V X5R 0402", Device Package="0402 (1005 Metric)", Manufacturer=Murata, Part Number=GRM155R60J475ME87D, Supplier Part Number 1=490-5408-2-ND, TemperatureCoefficient=X5R, TemperatureRange="-55C ~ 85C", Tolerance=20%, Voltage=6.3V, ComponentLink1Description=Datasheet, ComponentLink1URL=http://www.murata.com/~/media/webrenewal/support/library/catalog/products/capacitor/mlcc/c02e.pdf, ComponentLink2Description="Digi-Key Listing", ComponentLink2URL=https://www.digikey.com/product-detail/en/murata-electronics-north-america/GRM155R60J475ME87D/490-5408-2-ND/2175194, PartId=CM0507, Price=0.0194, Supplier 1=Digi-Key
C6 C7 C8 C9 C10 C11 C12 C13 C14 C15 C16 C17 C18 C19 C20 C21 C22 C23 C24 C25 C26 C27 C28 C29 C32 C33 C34: library part CM0464, "CAP CER 100NF 25V X5R 0402", Device Package="0402 (1005 Metric)", Manufacturer=Murata, Part Number=GRM155R61E104KA87D, Supplier Part Number 1=490-5920-2-ND, TemperatureCoefficient=X5R, TemperatureRange="-55C ~ 85C", Tolerance=10%, Voltage=25V, ComponentLink1Description=Datasheet, ComponentLink1URL=http://www.murata.com/~/media/webrenewal/support/library/catalog/products/capacitor/mlcc/c02e.pdf, ComponentLink2Description="Digi-Key Listing", ComponentLink2URL=https://www.digikey.com/product-detail/en/murata-electronics-north-america/GRM155R61E104KA87D/490-5920-2-ND/3693681, PartId=CM0464, Price=0.0048, Supplier 1=Digi-Key
C30 C31: library part CM0490, "CAP CER 1UF 6.3V X5R 0402", Device Package="0402 (1005 Metric)", Manufacturer=Murata, Part Number=GRM155R60J105KE19D, Supplier Part Number 1=490-1320-2-ND, TemperatureCoefficient=X5R, TemperatureRange="-55C ~ 85C", Tolerance=10%, Voltage=6.3V, ComponentLink1Description=Datasheet, ComponentLink1URL=http://www.murata.com/~/media/webrenewal/support/library/catalog/products/capacitor/mlcc/c02e.pdf, ComponentLink2Description="Digi-Key Listing", ComponentLink2URL=https://www.digikey.com/product-detail/en/murata-electronics-north-america/GRM155R60J105KE19D/490-1320-2-ND/587208, PartId=CM0490, Price=0.006, Supplier 1=Digi-Key
D1: library part LS0044, "LED GREEN CLEAR 0603 SMD", Current (Test)=20mA, Device Package="0603 (1608 Metric)", Manufacturer="Lite-On Inc.", Part Number=LTST-C191KGKT, Supplier Part Number 1=160-1446-2-ND, Voltage Forward=2V, Colour=Green, ComponentLink1Description=Datasheet, ComponentLink1URL=http://optoelectronics.liteon.com/upload/download/DS22-2000-228/LTST-C191KGKT.pdf, ComponentLink2Description="Digi-Key Listing", ComponentLink2URL=http://www.digikey.ca/product-detail/en/LTST-C191KGKT/160-1446-2-ND/386835, Lens Transparency=Clear, Millicandela=35mcd, PartId=LS0044, Price=0.0521, Supplier 1=Digi-Key, Type="Surface Mount", Viewing Angle=130
D2: library part LS0043, "LED RED CLEAR 0603 SMD", Current (Test)=20mA, Device Package="0603 (1608 Metric)", Manufacturer="Lite-On Inc.", Part Number=LTST-C191KRKT, Supplier Part Number 1=160-1447-2-ND, Voltage Forward=2V, Colour=Red, ComponentLink1Description=Datasheet, ComponentLink1URL=http://optoelectronics.liteon.com/upload/download/DS22-2000-223/LTST-C191KRKT.pdf, ComponentLink2Description="Digi-Key Listing", ComponentLink2URL=http://www.digikey.ca/product-detail/en/LTST-C191KRKT/160-1447-2-ND/386837, Lens Transparency=Clear, Millicandela=54mcd, PartId=LS0043, Price=0.0521, Supplier 1=Digi-Key, Viewing Angle=130
D3 D4 D5 D6: library part LS0046, "LED YELLOW CLEAR 0603 SMD", Current (Test)=20mA, Device Package="0603 (1608 Metric)", Manufacturer="Lite-On Inc.", Part Number=LTST-C191KSKT, Supplier Part Number 1=160-1448-2-ND, Voltage Forward=2.1V, Colour=Yellow, ComponentLink1Description=Datasheet, ComponentLink1URL=http://optoelectronics.liteon.com/upload/download/DS22-2000-224/LTST-C191KSKT.pdf, ComponentLink2Description="Digi-Key Listing", ComponentLink2URL=http://www.digikey.ca/product-detail/en/LTST-C191KSKT/160-1448-2-ND/386839, Lens Transparency=Clear, Millicandela=104mcd, PartId=LS0046, Price=0.0555, Supplier 1=Digi-Key, Type="Surface Mount", Viewing Angle=130
J1 J2: library part CU0055, "USB 2.0 Type C, Receptacle, Horizontal, SMT", Manufacturer=JAE, Part Number=DX07S016JA1R1500, Supplier Part Number 1=670-DX07S016JA1R1500CT-ND, ComponentLink1Description=Datasheet, ComponentLink1URL=https://www.jae.com/en/connectors/series/detail/product/id=91780&type_code=T1010, Number Of Positions=12, PartId=CU0055, Supplier 1=Digi-Key, Supplier 2=Mouser, Supplier Part Number 2=656-DX07S016JA1R1500, Type="USB - C"
J3: library part CU0022, "USB 2.0 Type A, Receptacle, Horizontal, SMT, with Pegs", Manufacturer=Wurth, Part Number=629104151021, Supplier Part Number 1=710-629104151021, ComponentLink1Description=Datasheet, ComponentLink1URL=https://www.we-online.com/components/products/datasheet/629104151021.pdf, Number Of Positions=4, PartId=CU0022, Supplier 1=Mouser, Type="USB - A"
R1 R3 R5 R6: library part RC1490, "RES SMD 5.1K OHM 1% 1/16W 0402", Device Package="0402 (1005 Metric)", Manufacturer=Yageo, Part Number=RC0402FR-075K1L, PowerRating="0.0625W, 1/16W", Supplier Part Number 1=603-RC0402FR-075K1L, TemperatureCoefficient=100ppm/C, TemperatureRange="-55C ~ 155C", Tolerance=1%, ComponentLink1Description=Datasheet, ComponentLink1URL=http://www.yageo.com/NewPortal/yageodocoutput?fileName=/pdf/R-Chip/PYu-RC_Group_51_RoHS_L_9.pdf, PartId=RC1490, Price=0.0043, Supplier 1=Mouser, Type="Thick Film"
R2 R4 R10 R11 R12 R13 R14 R15: library part RC1434, "RES SMD 2.2K OHM 1% 1/16W 0402", Device Package="0402 (1005 Metric)", Manufacturer=Yageo, Part Number=RC0402FR-072K2L, PowerRating="0.0625W, 1/16W", Supplier Part Number 1=603-RC0402FR-072K2L, TemperatureCoefficient=100ppm/C, TemperatureRange="-55C ~ 155C", Tolerance=1%, ComponentLink1Description=Datasheet, ComponentLink1URL=http://www.yageo.com/NewPortal/yageodocoutput?fileName=/pdf/R-Chip/PYu-RC_Group_51_RoHS_L_9.pdf, PartId=RC1434, Price=0.0043, Supplier 1=Mouser, Type="Thick Film"
R7 R8 R9 R16 R20 R24: library part RC1531, "RES SMD 10K OHM 1% 1/16W 0402", Device Package="0402 (1005 Metric)", Manufacturer=Yageo, Part Number=RC0402FR-0710KL, PowerRating="0.0625W, 1/16W", Supplier Part Number 1=603-RC0402FR-0710KL, TemperatureCoefficient=100ppm/C, TemperatureRange="-55C ~ 155C", Tolerance=1%, ComponentLink1Description=Datasheet, ComponentLink1URL=http://www.yageo.com/NewPortal/yageodocoutput?fileName=/pdf/R-Chip/PYu-RC_Group_51_RoHS_L_9.pdf, PartId=RC1531, Price=0.0043, Supplier 1=Mouser, Type="Thick Film"
R17: library part RC0971, "RES SMD 0 OHM 5% 1/16W 0402", Device Package="0402 (1005 Metric)", Manufacturer=Yageo, Part Number=RC0402JR-070RL, PowerRating="0.0625W, 1/16W", Supplier Part Number 1=603-RC0402JR-070RL, TemperatureCoefficient=100ppm/C, TemperatureRange="-55C ~ 155C", Tolerance=5%, ComponentLink1Description=Datasheet, ComponentLink1URL=http://www.yageo.com/NewPortal/yageodocoutput?fileName=/pdf/R-Chip/PYu-RC_Group_51_RoHS_L_9.pdf, PartId=RC0971, Price=0.0043, Supplier 1=Mouser, Type="Thick Film"
R18 R19: library part RC1342, "RES SMD 470 OHM 1% 1/16W 0402", Device Package="0402 (1005 Metric)", Manufacturer=Yageo, Part Number=RC0402FR-07470RL, PowerRating="0.0625W, 1/16W", Supplier Part Number 1=603-RC0402FR-07470RL, TemperatureCoefficient=100ppm/C, TemperatureRange="-55C ~ 155C", Tolerance=1%, ComponentLink1Description=Datasheet, ComponentLink1URL=http://www.yageo.com/NewPortal/yageodocoutput?fileName=/pdf/R-Chip/PYu-RC_Group_51_RoHS_L_9.pdf, PartId=RC1342, Price=0.0043, Supplier 1=Mouser, Type="Thick Film"
R21: library part RC1570, "RES SMD 20K OHM 1% 1/16W 0402", Device Package="0402 (1005 Metric)", Manufacturer=Yageo, Part Number=RC0402FR-0720KL, PowerRating="0.0625W, 1/16W", Supplier Part Number 1=603-RC0402FR-0720KL, TemperatureCoefficient=100ppm/C, TemperatureRange="-55C ~ 155C", Tolerance=1%, ComponentLink1Description=Datasheet, ComponentLink1URL=http://www.yageo.com/NewPortal/yageodocoutput?fileName=/pdf/R-Chip/PYu-RC_Group_51_RoHS_L_9.pdf, PartId=RC1570, Price=0.0043, Supplier 1=Mouser, Type="Thick Film"
R22: library part RC1517, "RES SMD 8.06K OHM 1% 1/16W 0402", Device Package="0402 (1005 Metric)", Manufacturer=Yageo, Part Number=RC0402FR-078K06L, PowerRating="0.0625W, 1/16W", Supplier Part Number 1=603-RC0402FR-078K06L, TemperatureCoefficient=100ppm/C, TemperatureRange="-55C ~ 155C", Tolerance=1%, ComponentLink1Description=Datasheet, ComponentLink1URL=http://www.yageo.com/NewPortal/yageodocoutput?fileName=/pdf/R-Chip/PYu-RC_Group_51_RoHS_L_9.pdf, PartId=RC1517, Price=0.0043, Supplier 1=Mouser, Type="Thick Film"
R23: library part RC1600, "RES SMD 33K OHM 1% 1/16W 0402", Device Package="0402 (1005 Metric)", Manufacturer=Yageo, Part Number=RC0402FR-0733KL, PowerRating="0.0625W, 1/16W", Supplier Part Number 1=603-RC0402FR-0733KL, TemperatureCoefficient=100ppm/C, TemperatureRange="-55C ~ 155C", Tolerance=1%, ComponentLink1Description=Datasheet, ComponentLink1URL=http://www.yageo.com/NewPortal/yageodocoutput?fileName=/pdf/R-Chip/PYu-RC_Group_51_RoHS_L_9.pdf, PartId=RC1600, Price=0.0043, Supplier 1=Mouser, Type="Thick Film"
R25 R26: library part RC1484, "RES SMD 4.7K OHM 1% 1/16W 0402", Device Package="0402 (1005 Metric)", Manufacturer=Yageo, Part Number=RC0402FR-074K7L, PowerRating="0.0625W, 1/16W", Supplier Part Number 1=603-RC0402FR-074K7L, TemperatureCoefficient=100ppm/C, TemperatureRange="-55C ~ 155C", Tolerance=1%, ComponentLink1Description=Datasheet, ComponentLink1URL=http://www.yageo.com/NewPortal/yageodocoutput?fileName=/pdf/R-Chip/PYu-RC_Group_51_RoHS_L_9.pdf, PartId=RC1484, Price=0.0043, Supplier 1=Mouser, Type="Thick Film"
U1 U3: library part IIF001, "TVS ARRAY SOT666", Device Package=SOTFL-6, Manufacturer=ST, Operating Temperature="-40C ~ 125C", Supplier Part Number 1=497-5026-1-ND, ComponentLink1Description=Datasheet, ComponentLink1URL=http://www.st.com/resource/en/datasheet/usblc6-2.pdf, Part Number=USBLC6-2P6, PartId=IIF001, Price=0.58, Supplier 1=Digi-Key, Supplier 2=Farnell, Supplier Part Number 2=1295310, Type="ESD Diode"
U2: library part URL111, "LDO 3.3V 300MA SOT23-5", Device Package=SOT23-5, Input Voltage MAX=5.5V, Manufacturer=TI, Operating Temperature="-40C ~ 125C", Output Current=300mA, Output Voltage=3.3V, Supplier Part Number 1=595-TPS7A2033PDBVR, ComponentLink1Description=Datasheet, ComponentLink1URL=https://www.ti.com/lit/ds/symlink/tps7a20.pdf, Part Number=TPS7A2033PDBVR, PartId=URL111, Price=0.15, Supplier 1=Mouser, Type=LDO
U4: library part IIF024, "MCU USB PHERIPH FX2LP 56VQFN", Device Package="56-QFN (8x8)", Manufacturer=Infineon, Operating Temperature="0C ~ 70C", Supplier Part Number 1=448-CY7C68013A-56LTXC-ND, ComponentLink1Description=Datasheet, ComponentLink1URL=https://www.infineon.com/dgdl/Infineon-CY7C68013A_CY7C68014A_CY7C68015A_CY7C68016A_EZ-USB_FX2LP_USB_Microcontroller_High-Speed_USB_Peripheral_Controller-DataSheet-v31_00-EN.pdf?fileId=8ac78c8c7d0d8da4017d0ec9f7974252, Part Number=CY7C68013A-56LTXC, PartId=IIF024, Price=12, Supplier 1=Digi-Key, Supplier 2=Mouser, Supplier Part Number 2=727-CY7C68013A56LTXC, Type="USB Microcontroller"
U5: library part ME0020, "IC EEPROM 8KBIT 400KHZ 8TSSOP", Device Package="8-TSSOP (0.173\", 4.40mm Width)", Manufacturer="Microchip Technology", Operating Temperature="-40C ~ 85C", Part Number=24LC08B-I/ST, Supplier Part Number 1=24LC08B-I/ST-ND, Voltage - Supply="2.5 V ~ 5.5 V", ComponentLink1Description=Datasheet, ComponentLink1URL=http://www.microchip.com/mymicrochip/filehandler.aspx?ddocname=en011847, ComponentLink2Description="Digi-Key Listing", ComponentLink2URL=http://www.digikey.com/product-detail/en/24LC08B-I%2FST/24LC08B-I%2FST-ND/362029, Interface="I2C, 2-Wire Serial", Memory Size="8K (4 x 256 x 8)", Memory Type=EEPROM, PartId=ME0020, Price=0.3, Speed=400kHz, Supplier 1=Digi-Key, Type=EEPROM
U6: library part UFL004, "FPGA, MACHXO2, 2112 LUTs", Device Package="100-TQFP (14x14)", Manufacturer=Lattice, Operating Temperature="-0C ~ 85C", Supplier Part Number 1=LCMXO2-2000HC-5TG100C-ND, ComponentLink1Description=Datasheet, ComponentLink1URL=https://www.latticesemi.com/view_document?document_id=38834, Part Number=LCMXO2-2000HC-5TG100C, PartId=UFL004, Price=16, Supplier 1=Digi-Key, Supplier 2=Mouser, Supplier Part Number 2=842-XO22000HC5TG100C, Type=FPGA
U7 U9 U10: library part UC0019, "IC COMP PP TSSOP-8", Device Package=TSSOP-8, Manufacturer=AD, Operating Temperature="-40C ~ 125C", Supplier Part Number 1=MAX9032AUA+-ND, ComponentLink1Description=Datasheet, ComponentLink1URL=https://www.analog.com/media/en/technical-documentation/data-sheets/MAX9030-MAX9034.pdf, Part Number=MAX9032AUA+, PartId=UC0019, Price=0.7, Supplier 1=Digi-Key, Supplier 2=Mouser, Supplier Part Number 2=700-MAX9032AUA, Type=Comparator
U8: library part IIF028, "USB ULPI PHY 24QFN", Device Package="24-QFN (4x4)", Manufacturer=Microchip, Operating Temperature="-40C ~ 85C", Supplier Part Number 1=USB3343-CP-ND, ComponentLink1Description=Datasheet, ComponentLink1URL=https://ww1.microchip.com/downloads/en/DeviceDoc/USB334x-Data-Sheet-DS00002646A.pdf, Part Number=USB3343-CP, PartId=IIF028, Price=1.8, Supplier 1=Digi-Key, Supplier 2=Mouser, Supplier Part Number 2=579-USB3343-CP, Type="USB ULPI Phy"
Y1: library part OX0029, "OSC XO 24MHz 3.3V 2016 SMD", Device Package="4-SMD, 2016", Frequency Stability=25ppm, Load Capacitance=15pF, Manufacturer=Wurth, Part Number=830208215109, Supplier Part Number 1=710-830208215109, Supply Voltage=3.3V, ComponentLink1Description=Datasheet, ComponentLink1URL=https://www.we-online.com/redexpert/spec/830208215109?ad, Frequency=24MHz, PartId=OX0029, Price=0.4, Series=IQXO-540, Supplier 1=Mouser, Type="XO (Standard)"
Y2: library part OX0070, "OSC XO 26MHz 3.3V 2016 SMD", Device Package="4-SMD, 2016", Frequency Stability=50ppm, Load Capacitance=15pF, Manufacturer=Wurth, Part Number=831056245, Supplier Part Number 1=710-831056245, Supply Voltage=3.3V, ComponentLink1Description=Datasheet, ComponentLink1URL=https://www.we-online.com/redexpert/spec/831056245?ad, Frequency=26MHz, PartId=OX0070, Price=0.4, Series=IQXO-540, Supplier 1=Mouser, Type="XO (Standard)"
TP1 TP2: Component Type="Standard (No BOM)", PartId="Test Point", Pin Count=1

## Via types
v1: diameter 0.4, hole 0.3, Top Layer to Bottom Layer, tented both sides, 127 vias
v2: diameter 0.5, hole 0.2, Top Layer to Bottom Layer, 20 vias
v3: diameter 0.5, hole 0.3, Top Layer to Bottom Layer, tented both sides, 15 vias
v4: diameter 0.45, hole 0.3, Top Layer to Bottom Layer, tented both sides, 5 vias
v5: diameter 0.6, hole 0.3, Top Layer to Bottom Layer, 4 vias

## Nets (pads, with @x,y where several pads share a name; then routed paths per layer and width w, separated by ;. In a path a pad name is that pad's centre, name@x,y a point inside that pad or via, vN(x,y) a via of type N, cw(c..) or ccw(c..) an arc to the next point about the centre after c; other vN are vias at no path point)
3.3V: C2.2 C6.1 C7.1 C8.2 C9.2 C10.2 C11.2 C12.2 C13.2 C14.2 C15.1 C16.1 C17.2 C18.1 C19.1 C20.1 C21.1 C22.1 C23.1 C24.1 C25.1 C26.1 C27.1 C28.1 C29.2 C32.1 C33.1 C34.1 R2.2 R7.2 R8.2 R10.2 R11.2 R16.2 R20.2 R24.1 TP1.1 U2.5 U4.3 U4.7 U4.11 U4.17 U4.27 U4.32 U4.43 U4.55 U5.1 U5.8 U6.5 U6.11 U6.23 U6.26 U6.46 U6.50 U6.55 U6.73 U6.80 U6.93 U6.100 U7.8 U8.9 U8.16 U9.8 U10.8 Y1.1 Y1.4 Y2.1 Y2.4 | length 48.9
  Top Layer w0.12: v1(5.3,23.2) 5.35,23.25 U4.7 ; U4.55 7.25,27.65 v1(7.3,27.7) ; U4.43@13.25,26.875 13.25,27.55 v1(13.3,27.6)
  Top Layer w0.15: v1(2.4,26) C15.1 2.55,25.65 Y1.1 Y1.4 ; U2.5 4.825,31.7 v3(5.4,31.7) v3(5.4,31) ; v3(4.6,30.6) 5,30.6 v3(5.4,31) ; v1(5.3,21.2) 5.35,21.25 U4.11 ; v1(5.4,25.3) 5.45,25.25 U4.3 ; v3(6.1,30.8) 5.6,30.8 v3(5.4,31) ; U4.17 7.75,18.281 v1(7.791,18.24) ; v1(8.7,14.3) C6.1 9.025,13.475 U5.8 ; v1(9,7.2) 9.025,7.175 U5.1 ; U4.27 12.75,18.45 v1(12.8,18.4) ; R10.2 v1(14,10.9) ; R11.2 v1(14,12.1) ; U4.32 14.55,21.25 v1(14.6,21.2) ; U6.73 18,20.5 v1(18.1,20.4) ; U6.55 18,29.5 v1(18.1,29.6) ; U6.50 v1(19,34.4) ; v1(20,35.5) R2.2 ; U6.80 21,18.5 v1(21.1,18.6) ; U6.46 v1(21,34.4) ; U6.93 27.5,18.5 v1(27.6,18.6) ; U6.100 v1(31,18.6) ; U6.26 v1(31,34.4) ; v1(31.9,21.4) 32,21.5 U6.5 ; v1(31.9,24.5) U6.11 ; v1(31.9,30.6) 32,30.5 U6.23 ; v1(37.1,25.5) 37.15,25.55 U8.9 ; U8.16 40.05,28.45 v1(40.1,28.5) ; v1(41.2,12.5) 41.25,12.45 U10.8 ; v1(41.2,16.5) 41.25,16.45 U9.8 ; v1(41.2,20.5) 41.25,20.45 U7.8
  Top Layer w0.2: C27.1 v1(36,33) 36.65,33 Y2.1 Y2.4
  Bottom Layer w0.15: v1(5.3,21.2) v1@5.3,21.3
  Bottom Layer w0.2: v1(5.3,21.2) 5.6,21.2 C8.2 ; v1(5.3,23.2) 5.6,23.2 C14.2 ; v1(5.4,25.3) C13.2 ; v1(7.3,27.7) 7.5,27.9 C7.1 ; v1(7.791,18.24) C9.2@7.791,18.791 ; v1(12.8,18.4) 13,18.6 C10.2 C10.2@13.559,18.659 ; v1(13.3,27.6) 13.7,27.6 13.9,27.8 C12.2 ; C11.2@14.011,21.111 C11.2 v1(14.6,21.2) R16.2 ; v1(18.1,20.4) 18.45,20.4 C21.1 ; v1(18.1,29.6) 18.45,29.6 C20.1 ; C16.1 v1(19,34.4) ; C23.1 v1(21,34.4) ; v1(21.1,18.6) 21.1,18.9 C18.1@21.3,19.1 ; v1(27.6,18.6) 27.6,18.9 C19.1@27.8,19.1 ; v1(31,18.6) C17.2 ; v1(31,34.4) C22.1 ; C26.1@31.4,21.2 31.6,21.4 v1(31.9,21.4) ; C25.1 v1(31.9,24.5) ; C24.1@31.4,30.8 31.6,30.6 v1(31.9,30.6) ; v1(35.6,30.4) R24.1 ; v1(37.1,25.5) C28.1 ; C29.2 v1(40.1,28.5) ; C34.1 v1(41.2,12.5) ; C33.1 v1(41.2,16.5) ; C32.1 v1(41.2,20.5)
BOOT: R9.2 TP2.1 U5.2 | length 7
  Top Layer w0.15: TP2.1 8.975,8 9.675,7.3 U5.2
CMP_DM_1: U6.96 U10.1 | length 10.9
  Top Layer w0.15: U6.96 29,16.2 29.8,15.4 32.8,15.4 36.225,11.975 U10.1
CMP_DM_2: U6.97 U9.1 | length 8.6
  Top Layer w0.15: U6.97 29.5,16.4 29.9,16 36.725,16 U9.1
CMP_DM_3: U6.98 U7.1 | length 9.1
  Top Layer w0.15: U6.98 30,16.7 30.1,16.6 32.7,16.6 35,18.9 36.075,19.975 U7.1
CMP_DP_1: U6.3 U10.7 | length 21.9
  Top Layer w0.15: U6.3 34.1,20.5 35.6,22 41.7,22 43,20.7 43,12.2 42.1,11.3 41.275,11.3 U10.7
CMP_DP_2: U6.2 U9.7 | length 16.5
  Top Layer w0.15: U6.2 34.4,20 35.8,21.4 41.3,21.4 42.4,20.3 42.4,15.6 42.125,15.325 U9.7
CMP_DP_3: U6.1 U7.7 | length 9.5
  Top Layer w0.15: U6.1 34.7,19.5 36,20.8 39,20.8 40.475,19.325 U7.7
CMP_REF_1: R25.1 R26.2 U10.2 U10.6 | length 6.3
  Top Layer w0.15: U10.2 37.675,11.325 v1(37.7,11.3) ; v1(40.3,10.7) 40.325,10.675 U10.6
  Bottom Layer w0.15: v1(37.7,11.3) 38.3,10.7 R26.2 ; R25.1 R26.2 ; v1(40.3,10.7) R26.2
CMP_REF_2: R23.1 R25.2 U9.2 U9.6 | length 6.3
  Top Layer w0.15: U9.2 37.675,15.325 v1(37.7,15.3) ; v1(40.3,14.7) 40.325,14.675 U9.6
  Bottom Layer w0.15: v1(37.7,15.3) 38.3,14.7 R23.1 ; R25.2 R23.1 ; v1(40.3,14.7) R23.1
CMP_REF_3: R20.1 R23.2 U7.2 U7.6 | length 8.3
  Top Layer w0.15: U7.2 38.275,19.325 38.9,18.7 38.925,18.675 U7.6
  Bottom Layer w0.15: R23.2 v1(39,18.7) R20.1
CTRL_CLK: U4.33 U6.71 | length 3.3
  Top Layer w0.15: U4.33 14.75,21.75 15,21.5 U6.71
CTRL_DATA: U4.36 U6.68 | length 3.3
  Top Layer w0.15: U4.36 14.95,23.25 15.2,23 U6.68
DBG_0: R15.2 U6.32 | length 7.5
  Top Layer w0.15: R15.2 23.5,34.5 27.6,34.5 28,34.1 U6.32
DBG_1: R14.2 U6.31 | length 6.1
  Top Layer w0.15: R14.2 25.1,34.9 27.9,34.9 28.5,34.3 U6.31
DBG_2: R13.2 U6.30 | length 4.7
  Top Layer w0.15: R13.2 26.7,35.3 28.1,35.3 29,34.4 U6.30
DBG_3: R12.2 U6.29 | length 3.2
  Top Layer w0.15: R12.2 29.5,34.5 U6.29
DMT: R19.1 U7.3 U9.3 U10.3 | length 15.4
  Top Layer w0.15: U10.3 38.275,10.675 38.3,10.7 ; U9.3 38.275,14.675 38.3,14.7 ; U7.3 37.625,18.675 38.3,18 38.3,14.7 ; R19.1 38.3,10.7 ; 38.3,10.7 38.3,14.7
DPT: R18.1 U7.5 U9.5 U10.5 | length 14.1
  Top Layer w0.15: R18.1 39.7,10 ; U10.5 39.725,10.025 39.7,10 ; U9.5 39.725,14.025 39.7,14 ; U7.5 40.325,18.025 39.7,17.4 39.7,14 ; 39.7,10 39.7,14
FD0: U4.18 U6.90 | length 21.7
  Top Layer w0.15: U4.18 8.25,17.95 v1(8.3,17.9) ; v4(25.896,16.25) 25.896,16.496 ccw(c25.645,16.747) 26,16.747 U6.90
  Bottom Layer w0.15: v1(8.3,17.9) 8.3,16.7 8.9,16.1 25.7,16.1 25.873,16.273 v4(25.896,16.25)
FD1: U4.19 U6.91 | length 21.1
  Top Layer w0.15: U4.19 8.75,18.25 v1(8.8,18.2) ; v4(26.5,16.5) U6.91
  Bottom Layer w0.15: v1(8.8,18.2) 8.8,17.1 9.2,16.7 26.3,16.7 v4(26.5,16.5)
FD2: U4.20 U6.94 | length 21.6
  Top Layer w0.15: U4.20 9.25,18.65 9.3,18.6 v1(9.3,17.9) ; v4(27.9,16.5) ccw(c27.659,16.741) 28,16.741 U6.94
  Bottom Layer w0.15: v1(9.3,17.9) 9.399,17.901 10,17.3 27.2,17.3 27.9,16.6 v4(27.9,16.5)
FD3: U4.21 U6.95 | length 21.6
  Top Layer w0.15: U4.21 9.75,18.25 v1(9.8,18.2) ; v4(28.5,16.5) U6.95
  Bottom Layer w0.15: v1(9.8,18.2) 10,18.2 10.3,17.9 27.4,17.9 28.5,16.8 v4(28.5,16.5)
FD4: U4.22 U6.87 | length 19.4
  Top Layer w0.15: U4.22 10.25,17.25 12.8,14.7 23.3,14.7 24.5,15.9 U6.87
FD5: U4.23 U6.86 | length 17.5
  Top Layer w0.15: U4.23 10.75,17.65 13.1,15.3 23.1,15.3 24,16.2 U6.86
FD6: U4.24 U6.85 | length 15.6
  Top Layer w0.15: U4.24 11.25,18.05 13.4,15.9 22.9,15.9 23.5,16.5 U6.85
FD7: U4.25 U6.84 | length 13.7
  Top Layer w0.15: U4.25 11.75,18.45 13.7,16.5 22.7,16.5 23,16.8 U6.84
FD8: U4.45 U6.57 | length 6.3
  Top Layer w0.15: U4.45 12.25,28.25 12.5,28.5 U6.57
FD9: U4.46 U6.54 | length 7.7
  Top Layer w0.15: U4.46 11.75,28.75 13,30 U6.54
FD10: U4.47 U6.53 | length 8.6
  Top Layer w0.15: U4.47 11.25,29.05 12.7,30.5 U6.53
FD11: U4.48 U6.52 | length 9.4
  Top Layer w0.15: U4.48 10.75,29.25 12.5,31 U6.52
FD12: U4.49 U6.51 | length 10.3
  Top Layer w0.15: U4.49 10.25,29.45 12.3,31.5 U6.51
FD13: U4.50 U6.43 | length 16.9
  Top Layer w0.15: U4.50 9.75,27.65 v1(9.8,27.7) ; v1(22.5,32.3) U6.43
  Bottom Layer w0.15: v1(9.8,27.7) 12.6,30.5 21.3,30.5 22.5,31.7 v1(22.5,32.3)
FD14: U4.51 U6.45 | length 16.6
  Top Layer w0.15: v1(9.2,27.7) 9.25,27.65 U4.51 ; v1(21.5,32.3) U6.45
  Bottom Layer w0.15: v1(9.2,27.7) 9.2,27.8 12.5,31.1 20.9,31.1 21.5,31.7 v1(21.5,32.3)
FD15: U4.52 U6.47 | length 16.2
  Top Layer w0.15: v1(8.6,27.7) 8.7,27.7 8.75,27.65 U4.52 ; v1(20.5,32.3) U6.47
  Bottom Layer w0.15: v1(8.6,27.7) 8.6,28 12.334,31.734 20.234,31.734 20.5,32 v1(20.5,32.3)
FIFOADR0: U4.37 U6.67 | length 3.3
  Top Layer w0.15: U4.37 15.25,23.75 15.5,23.5 U6.67
FIFOADR1: U4.38 U6.65 | length 3.3
  Top Layer w0.15: U4.38 15.25,24.25 15.5,24.5 U6.65
FLAGA: U4.29 U6.78 | length 7.5
  Top Layer w0.15: U4.29@13.875,19.75 14.85,19.75 15.8,18.8 19.6,18.8 20,18.4 U6.78
FLAGB: U4.30 U6.75 | length 3.5
  Top Layer w0.15: U4.30 15.05,20.25 15.8,19.5 U6.75
FLAGC: U4.31 U6.74 | length 3.5
  Top Layer w0.15: U4.31 15.25,20.75 16,20 U6.74
GND: C1.1 C2.1 C3.1 C4.1 C5.2 C6.2 C7.2 C8.1 C9.1 C10.1 C11.1 C12.1 C13.1 C14.1 C15.2 C16.2 C17.1 C18.2 C19.2 C20.2 C21.2 C22.2 C23.2 C24.2 C25.2 C26.2 C27.2 C28.2 C29.1 C30.1 C31.1 C32.2 C33.2 C34.2 D1.2 D2.2 D3.2 D4.2 D5.2 D6.2 J1.1 J1.12 J1.S J2.1 J2.12 J2.S J3.4 J3.S R1.1 R3.1 R5.1 R6.1 R9.1 R22.1 R26.1 U1.2 U2.2 U3.2 U4.6 U4.10 U4.12 U4.26 U4.28 U4.41 U4.53 U4.56 U4.57 U5.3 U5.4 U5.7 U6.6 U6.22 U6.33 U6.44 U6.56 U6.72 U6.79 U6.92 U7.4 U8.25 U9.4 U10.4 Y1.2 Y2.2 | length 61.1
  Top Layer w0.12: v1(5.3,23.8) 5.35,23.75 U4.6 ; v1(6.7,27.7) 6.75,27.65 U4.56@6.75,26.875 ; U4.53 8.25,26.221 ccw(c8.421,26.221) v4(8.3,26.1)
  Top Layer w0.15: v1(2.4,24) C15.2 2.55,24.35 v1(3,24.35) Y1.2 v1(3.6,23.7) ; v3(3.6,33.3) U2.2 v3(3.6,35) v3(3.6,35.8) v3(3.6,36.7) v3@3.7,36.7 ; v3(4.5,32.9) v3(5.5,32.9) C2.1 ; v1(5.3,21.8) 5.35,21.75 U4.10 ; U4.12 6.75,20.75 v1(6.799,20.8) v1@6.799,20.801 ; R9.1 v1(6.8,9.5) ; U1.2 v1(9.7,33.7) ; U5.7 9.675,11.225 v1(9.7,11.2) ; v1@9.675,14.275 v1(9.7,14.3) C6.2 ; U5.3 10.325,7.125 v1(10.4,7.2) ; U5.4 10.975,7.175 v1(11,7.2) ; v1(12.2,19.9) 12.25,19.85 U4.26 ; v1(13,19.9) 13,19.8 13.175,19.625 13.175,19.605 13.25,19.53 U4.28@13.25,19.125 ; U6.72 18,21 v1(18.1,21.1) ; U6.56 18,29 v1(18.1,28.9) ; D1.2 v1(20,40.9) ; v1(20.4,18.6) 20.5,18.5 U6.79 ; U6.44 v1(22,34.4) ; D6.2 v1(22,40.9) ; D5.2 v1(24,40.9) ; D4.2 v1(26,40.9) ; v1(26.9,18.6) 27,18.5 U6.92 ; v1(27.5,32.4) U6.33 ; D3.2 v1(28,40.9) ; D2.2 v1(30,40.9) ; v1(31.9,22.1) 32,22 U6.6 ; v1(31.9,29.9) 32,30 U6.22 ; v1(33.9,31.8) C31.1 ; v1(36.101,31.801) 36.55,31.8 Y2.2 ; v1(36.7,9.5) 36.75,9.55 U10.4 ; v1(36.7,13.5) 36.75,13.55 U9.4 ; v1(36.7,17.5) 36.75,17.55 U7.4 ; R22.1 v1(38.9,33.1) ; v1(40.3,33.7) U3.2 ; C30.1 v1(42.3,27.8)
  Top Layer w0.2: v1(13.1,25.7) 13.15,25.75 U4.41 ; v1(33.9,33) C27.2
  Top Layer w0.4: v1(33.1,2) 33.1,2.4 33.3,2.6 33.7,2.6 33.9,2.4 v1(33.9,2) ; v1(45.6,39.5) 45.6,39.1 45.8,38.9 46.2,38.9 46.4,39.1 v1(46.4,39.5)
  Top Layer w0.5: J1.S@6.68,36.275 7.055,35.9 J1.12 ; J1.1 14.945,35.9 J1.S@15.32,36.275 ; J2.S@34.68,36.275 35.055,35.9 J2.12 ; J2.1 42.945,35.9 J2.S@43.32,36.275
  Bottom Layer w0.15: C12.1 v1(14.4,29.1)
  Bottom Layer w0.2: v1(5.3,21.8) 5.6,21.8 C8.1 ; v1(5.3,23.8) 5.6,23.8 C14.1 ; C7.2 6.5,27.9 v1(6.7,27.7) ; C13.1 v1(7.4,25.3) ; C9.1 7.9,19.9 v1(8.5,19.9) ; R3.1 v1(9.7,37.1) ; v1(12.6,21.2) C11.1@13.135,21.2 ; R1.1 v1(12.8,37.1) ; v1(13,19.9) 13.2,19.9 C10.1 ; v1(13.1,25.7) C5.2 ; C16.2 v1(18,34.4) ; v1(18.1,21.1) 18.4,21.1 C21.2@18.6,21.3 ; v1(18.1,28.9) 18.4,28.9 C20.2@18.6,28.7 ; C18.2@20.3,19.1 20.4,19 v1(20.4,18.6) ; C23.2 v1(22,34.4) ; C19.2@26.8,19.1 26.9,19 v1(26.9,18.6) ; v1(29.9,24.5) C25.2 ; C17.1 v1(31,20.6) ; C22.2 v1(31,36.4) ; C26.2@31.4,22.2 31.5,22.1 v1(31.9,22.1) ; C24.2@31.4,29.8 31.5,29.9 v1(31.9,29.9) ; v1(35.6,26.1) C28.2 ; R6.1 v1(37.7,37.1) ; v1(39,9.2) R26.1 ; C29.1 v1(39.6,30) ; C34.2 v1(40.2,12.5) ; C33.2 v1(40.2,16.5) ; C32.2 v1(40.2,20.5) ; R5.1 v1(40.8,37.1)
  other v1: 8,15.1 25.4,15.5 26.5,15.9 27.9,15.9 9.3,17.3 9.5,19.9 9.5,26.1 21.003,31.926 22.003,31.926
  other v2: 8.35,20.8 9.45,20.8 10.55,20.8 11.65,20.8 8.35,21.9 9.45,21.9 10.55,21.9 11.65,21.9 8.35,23 9.45,23 10.55,23 11.65,23 8.35,24.1 9.45,24.1 10.55,24.1 11.65,24.1 8.35,25.2 9.45,25.2 10.55,25.2 11.65,25.2
  other v3: 29.486,11.302 29.486,12.002 29.486,12.702 29.486,13.402 29.5,14.1
  other v5: 36.85,27.65 37.95,27.65 36.85,28.75 37.95,28.75
GPIO: U4.40 U6.63 | length 3.3
  Top Layer w0.15: U4.40 14.55,25.25 14.8,25.5 U6.63
HCLK: U4.5 Y1.3 | length 1.7
  Top Layer w0.12: Y1.3 4.7,24.25 U4.5@6.225,24.25
IFCLK: U4.13 U6.88 | length 25.8
  Top Layer w0.15: U4.13 5.35,20.25 5.1,20 5.1,18.4 7.8,15.7 v1(8,15.7) ; v1(24.8,15.5) 25,15.7 U6.88
  Bottom Layer w0.15: v1(8,15.7) 8.2,15.5 v1(24.8,15.5)
JTAGEN: R16.1 U4.34 U6.70 U6.82 | length 11.3
  Top Layer w0.15: U4.34 v1(14.6,22.25) 14.75,22.25 15,22 U6.70 18.8,22 22,18.8 U6.82
  Bottom Layer w0.15: v1(14.6,22.25) 14.65,22.2 R16.1
NetC30_2: C30.2 U8.15 U8.18 | length 5.7
  Top Layer w0.15: U8.15 40.65,27.95 C30.2 41.4,28.4 41.4,29.5 41.1,29.8 40.6,29.8 40.25,29.45 U8.18
NetC31_2: C31.2 U8.23 | length 1.9
  Top Layer w0.15: C31.2@35.6,31.7 36.65,30.65 U8.23
NetD1_1: D1.1 R2.1 | length 1.7
  Top Layer w0.15: R2.1 D1.1
NetD2_1: D2.1 R4.2 | length 1.7
  Top Layer w0.15: R4.2 D2.1
NetD3_1: D3.1 R12.1 | length 1.7
  Top Layer w0.15: R12.1 D3.1
NetD4_1: D4.1 R13.1 | length 1.7
  Top Layer w0.15: R13.1 D4.1
NetD5_1: D5.1 R14.1 | length 1.7
  Top Layer w0.15: R14.1 D5.1
NetD6_1: D6.1 R15.1 | length 1.7
  Top Layer w0.15: R15.1 D6.1
NetJ1_3: J1.3 R1.2 | length 1.3
  Top Layer w0.12: J1.3 J1.3@12.8,35.85
  Top Layer w0.2: v1(12.8,35.1) J1.3@12.8,35.85
  Bottom Layer w0.2: v1(12.8,35.1) R1.2
NetJ1_5: J1.5 J1.8 U1.3 | length 6.3
  Top Layer w0.12: U1.3 9.4,34 9.487,34.088 9.881,34.344 10.299,34.926 10.347,35.125 J1.8@10.347,35.9
  Top Layer w0.149: J1.8@10.324,35.924 10.324,36.699 cw(c10.779,36.699) 10.779,37.154 11.211,37.154 cw(c11.211,36.69) 11.675,36.69 J1.5@11.675,36.1
NetJ1_6: J1.6 J1.7 U1.1 | length 5.7
  Top Layer w0.12: U1.1 9.966,33.314 10.125,33.63 10.125,34.145 10.502,34.749 10.587,34.998 10.75,35.867 J1.7@10.755,35.893
  Top Layer w0.149: J1.7@10.75,35.45 J1.7 10.675,35.975 10.675,36.585 cw(c10.915,36.585) 10.915,36.825 11.075,36.825 cw(c11.075,36.575) 11.325,36.575 11.325,36.225 J1.6@11.3,36.2
NetJ1_9: J1.9 R3.2 | length 1.3
  Top Layer w0.12: J1.9@9.7,35.85 J1.9
  Top Layer w0.2: v1(9.7,35.1) J1.9@9.7,35.85
  Bottom Layer w0.2: v1(9.7,35.1) R3.2
NetJ2_3: J2.3 R5.2 | length 1.3
  Top Layer w0.12: J2.3 J2.3@40.8,35.85
  Top Layer w0.2: v1(40.8,35.1) J2.3@40.8,35.85
  Bottom Layer w0.2: v1(40.8,35.1) R5.2
NetJ2_5: J2.5 J2.8 U3.1 | length 6.5
  Top Layer w0.12: J2.5 39.653,35.9 39.653,35.15 39.754,34.853 40.119,34.344 40.513,34.088 40.6,34 U3.1
  Top Layer w0.149: J2.8@38.325,36.1 38.325,36.69 cw(c38.789,36.69) 38.789,37.154 39.221,37.154 cw(c39.221,36.699) 39.676,36.699 39.676,35.924 J2.5@39.736,35.863
NetJ2_6: J2.6 J2.7 U3.3 | length 5.3
  Top Layer w0.12: J2.6@39.245,35.893 39.389,35.123 39.538,34.683 39.875,34.145 39.875,33.63 40.034,33.314 U3.3
  Top Layer w0.149: J2.7@38.7,36.2 38.675,36.225 38.675,36.575 cw(c38.925,36.575) 38.925,36.825 39.085,36.825 cw(c39.085,36.585) 39.325,36.585 39.325,35.975 J2.6
NetJ2_9: J2.9 R6.2 | length 1.3
  Top Layer w0.12: J2.9@37.7,35.85 J2.9
  Top Layer w0.2: v1(37.7,35.1) J2.9@37.7,35.85
  Bottom Layer w0.2: v1(37.7,35.1) R6.2
NetR7_1: R7.1 U4.44 | length 1.2
  Top Layer w0.15: v1(12.7,27.6) 12.75,27.55 U4.44
  Bottom Layer w0.15: v1(12.7,27.6) R7.1
NetR17_1: R17.1 U8.14 | length 4
  Top Layer w0.12: U8.14 40.05,27.45 40.2,27.3 43.1,27.3 R17.1@43.3,27.5
NetR21_2: R21.2 U8.17 | length 1.6
  Top Layer w0.15: U8.17 40.75,28.95 R21.2
NetR22_2: R22.2 U8.19 | length 1.5
  Top Layer w0.15: U8.19 38.65,31.35 R22.2
NetR24_2: R24.2 U8.22 | length 1.4
  Top Layer w0.15: v1(37.1,30.9) 37.15,30.85 U8.22
  Bottom Layer w0.15: R24.2@36.502,30.998 R24.2 v1(37.1,30.9)
PKTEND: U4.39 U6.64 | length 3.3
  Top Layer w0.15: U4.39 14.95,24.75 15.2,25 U6.64
RESET: C5.1 R8.1 U4.42 | length 1.9
  Top Layer w0.15: U4.42@13.875,26.25 14.55,26.25 v1(14.6,26.2)
  Bottom Layer w0.15: C5.1 v1(14.6,26.2) R8.1
SCL: R10.1 U4.15 U5.6 | length 12
  Top Layer w0.15: U4.15@6.75,19.125 6.75,17.65 8.6,15.8 9.1,15.8 10.3,14.6 10.3,12.175 U5.6 10.325,11.275 10.7,10.9 R10.1
SDA: R11.1 U4.16 U5.5 | length 10.4
  Top Layer w0.15: U4.16 7.25,17.95 8.9,16.3 9.4,16.3 10.975,14.725 U5.5 11.025,12.1 R11.1
SLOE: U4.35 U6.69 | length 3.3
  Top Layer w0.15: U4.35 14.75,22.75 15,22.5 U6.69
SLRD: U4.1 U6.48 | length 19.1
  Top Layer w0.15: U4.1@6.125,26.25 6.075,26.3 5.7,26.3 5.7,27.5 6.6,28.4 8.5,28.4 12.1,32 18.1,32 18.3,31.8 19.4,31.8 20,32.4 U6.48
SLWR: U4.2 U6.49 | length 19.9
  Top Layer w0.15: U4.2 5.55,25.75 5.2,26.1 5.2,27.8 6.3,28.9 8.3,28.9 11.9,32.5 18.5,32.5 18.6,32.4 19.3,32.4 19.5,32.6 U6.49
UCLK: U8.21 Y2.3 | length 1.5
  Top Layer w0.15: U8.21 37.65,31.6 Y2.3
ULPI.CLKOUT: U6.20 U8.2 | length 2.5
  Top Layer w0.15: U6.20 34.4,29 34.45,28.95 U8.2
ULPI.D0: U6.18 U8.4 | length 2.5
  Top Layer w0.15: U6.18 34.4,28 34.45,27.95 U8.4
ULPI.D1: U6.17 U8.5 | length 2.5
  Top Layer w0.15: U6.17 34.4,27.5 34.45,27.45 U8.5
ULPI.D2: U6.16 U8.6 | length 2.5
  Top Layer w0.15: U6.16 34.4,27 34.45,26.95 U8.6
ULPI.D3: U6.15 U8.7 | length 4.1
  Top Layer w0.15: U6.15 33.9,26.5 34.8,25.6 36,25.6 36.15,25.75 U8.7
ULPI.D4: U6.13 U8.8 | length 4.8
  Top Layer w0.15: U6.13 34,25.5 34.4,25.1 36.2,25.1 36.65,25.55 U8.8
ULPI.D5: U6.10 U8.10 | length 6.2
  Top Layer w0.15: U6.10 36.3,24 37.65,25.35 U8.10
ULPI.D6: U6.9 U8.11 | length 7
  Top Layer w0.15: U6.9 36.6,23.5 38.15,25.05 U8.11
ULPI.D7: U6.8 U8.12 | length 7.9
  Top Layer w0.15: U6.8 36.9,23 38.65,24.75 U8.12
ULPI.DIR: U6.21 U8.1 | length 2.5
  Top Layer w0.15: U6.21 34.4,29.5 34.45,29.45 U8.1
ULPI.NXT: U6.19 U8.3 | length 2.5
  Top Layer w0.15: U6.19 34.4,28.5 34.45,28.45 U8.3
ULPI.STP: U6.24 U8.24 | length 3.8
  Top Layer w0.15: U6.24 35.8,31 36.15,30.65 U8.24
USBH_N: U1.4 U4.9 | length 17.6
  Top Layer w0.12: U4.9 5.998,22.377 3.198,22.377 cw(c3.198,23.882) 2.133,22.817 1.537,23.414 cw(c2.221,24.099) 1.253,24.099 1.253,25.902 cw(c2.461,25.902) 1.253,25.904 cw(c2.461,25.902) 1.607,26.756 3.933,29.082 cw(c5.296,27.719) 5.296,29.647 5.395,29.647 ccw(c5.395,32.187) 7.034,30.247 ccw(c5.395,32.187) 7.191,30.391 8.153,31.353 8.153,31.483 8.089,31.548 8.089,32.014 U1.4
USBH_P: U1.6 U4.8 | length 17.1
  Top Layer w0.12: U4.8 5.998,22.623 3.3,22.623 cw(c3.3,24.129) 2.236,23.064 1.712,23.588 cw(c2.224,24.1) 1.5,24.1 1.5,25.9 cw(c2.466,25.9) 1.783,26.583 4.105,28.905 cw(c5.3,27.71) 5.3,29.4 5.398,29.4 ccw(c5.398,32.178) 7.123,30 ccw(c5.398,32.178) 7.363,30.214 8.399,31.25 8.689,31.25 U1.6
USBT_N: J3.2 R17.2 R19.2 U3.6 | length 48.8
  Top Layer w0.12: J3.2 24,11.6 24.877,10.723 24.877,9.627 ccw(c27.659,9.627) 25.692,7.659 25.783,7.568 ccw(c27.75,9.536) 27.75,6.753 40.652,6.753 ccw(c40.652,9.531) 42.616,7.567 43.233,8.184 ccw(c41.269,10.148) 44.047,10.148 44.047,28.048 ccw(c41.26,28.048) 43.231,30.019 41.912,31.338 41.912,32.015 U3.6
USBT_P: J3.3 R18.2 U3.4 U8.13 | length 52.4
  Top Layer w0.12: J3.3 26,11.662 25.123,10.785 25.123,9.629 ccw(c27.663,9.629) 25.867,7.833 25.956,7.744 ccw(c27.752,9.54) 27.752,7 40.648,7 ccw(c40.648,9.54) 42.444,7.744 43.056,8.356 ccw(c41.26,10.152) 43.8,10.152 43.8,26.95 43.8,27 ; U8.13 39.45,27 43.8,27 ; U3.4 41.312,31.25 41.65,31.25 42.7,30.2 43.056,29.844 cw(c41.26,28.048) 43.8,28.048 43.8,27
VBUS_H: C1.2 J1.2 J1.11 U1.5 U2.1 U2.3 | length 11.5
  Top Layer w0.15: U2.3 2.65,34.35 2,35 2,37.2 2.3,37.5 4.3,37.5 4.7,37.1 C1.2
  Top Layer w0.25: U1.5 8.9,32.4 8.8,32.6 8.3,32.9 8.2,33.2 J1.11
VBUS_T: C3.2 C4.2 J2.2 J2.11 J3.1 R4.1 R21.1 U3.5 | length 79.1